# Altium PCB Pollux III.PcbDoc (part 1 of 3)
Units mm, origin at the board's own origin, x right, y up, seen from the top; angles counter-clockwise.
Board outline 123 x 84.5 mm, 4 copper layers (Top Layer, Ground Layer, Source Layer, Bottom Layer), stack 0.742 mm thick; 118 components, 107 nets, 741 pads, 375 vias.
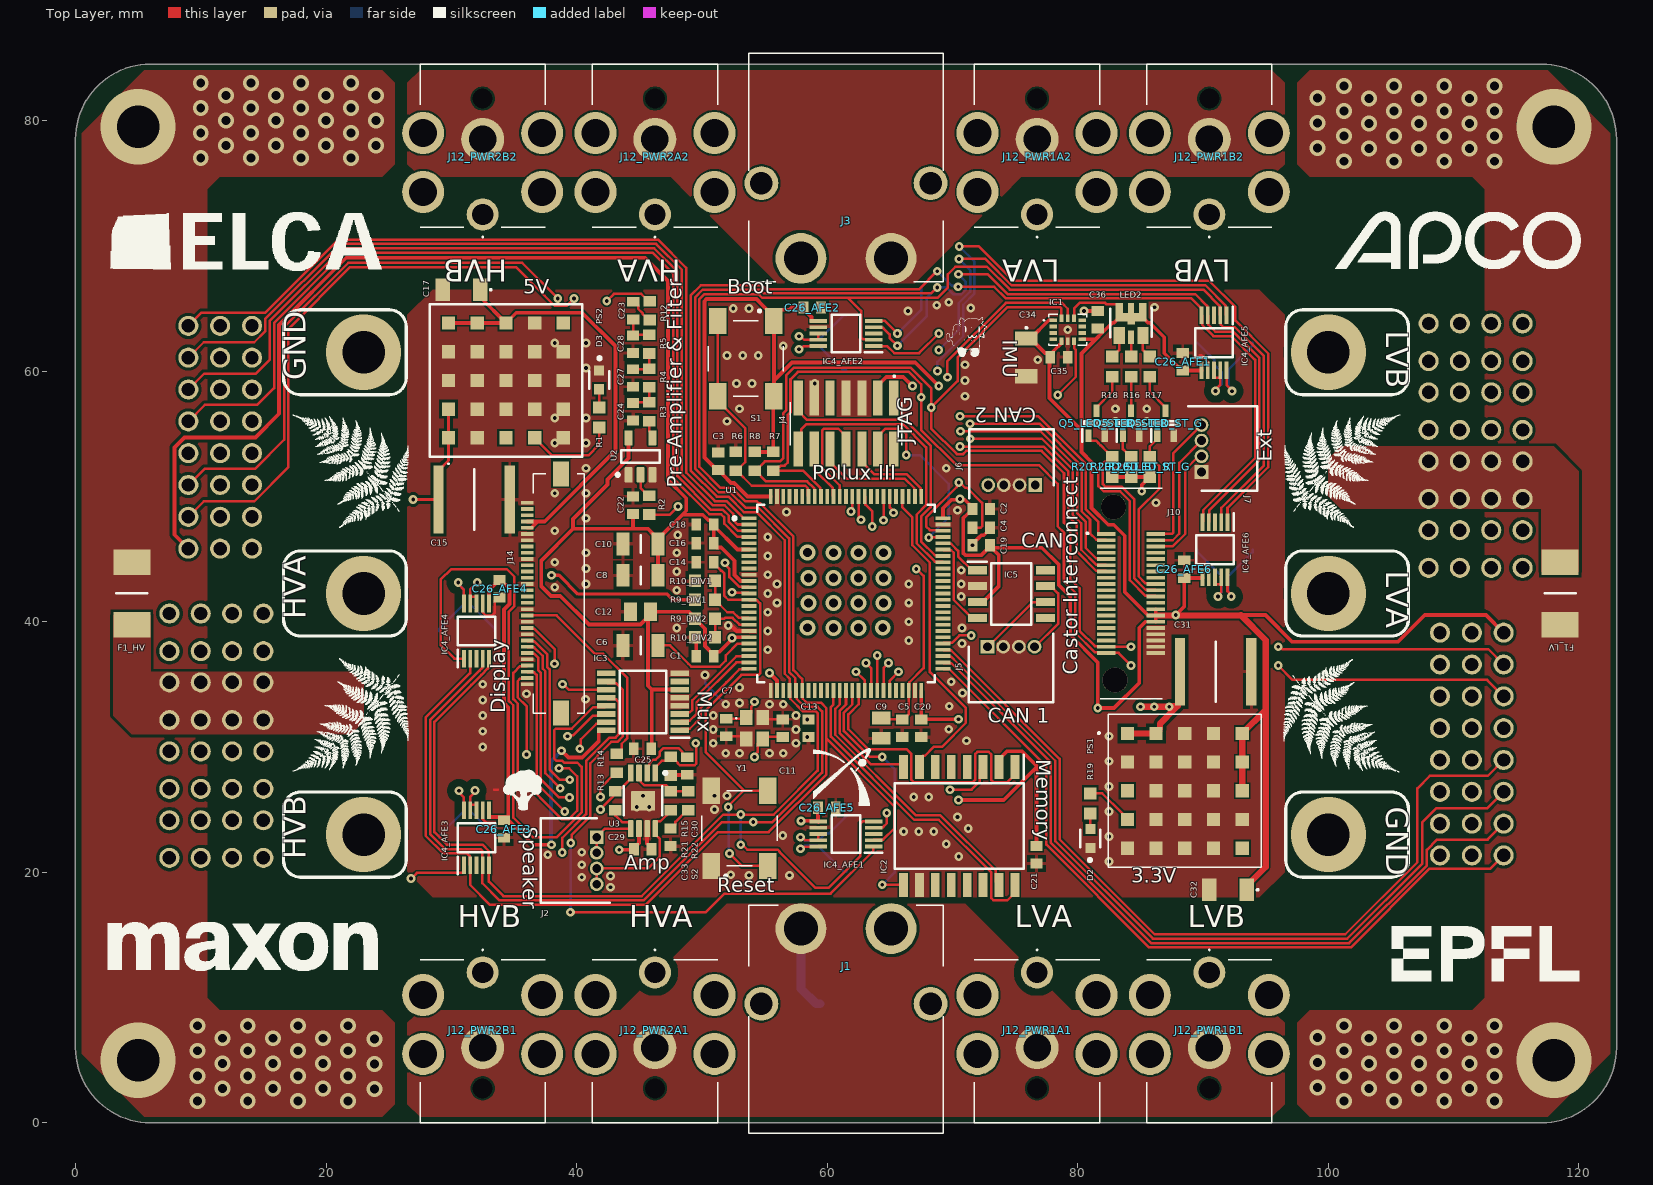
[diagram p0: Top Layer view]
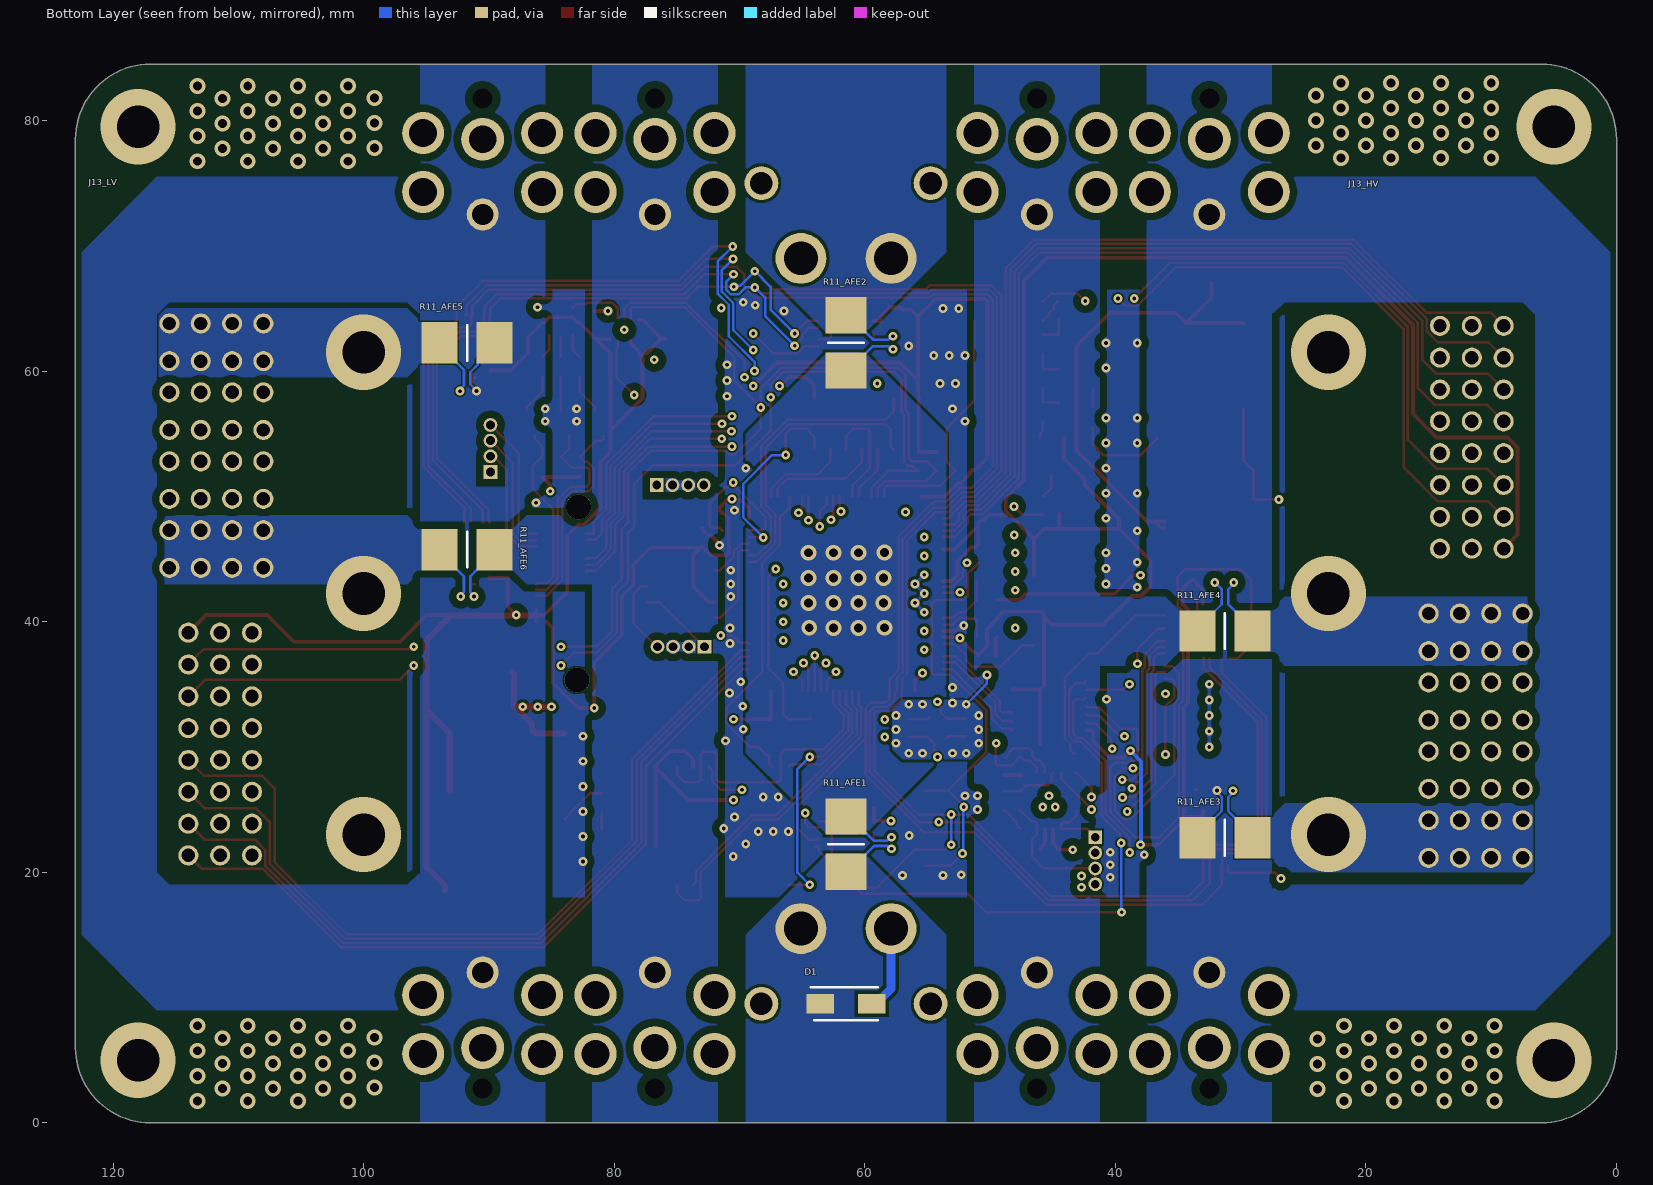
[diagram p1: Bottom Layer view, seen from below]
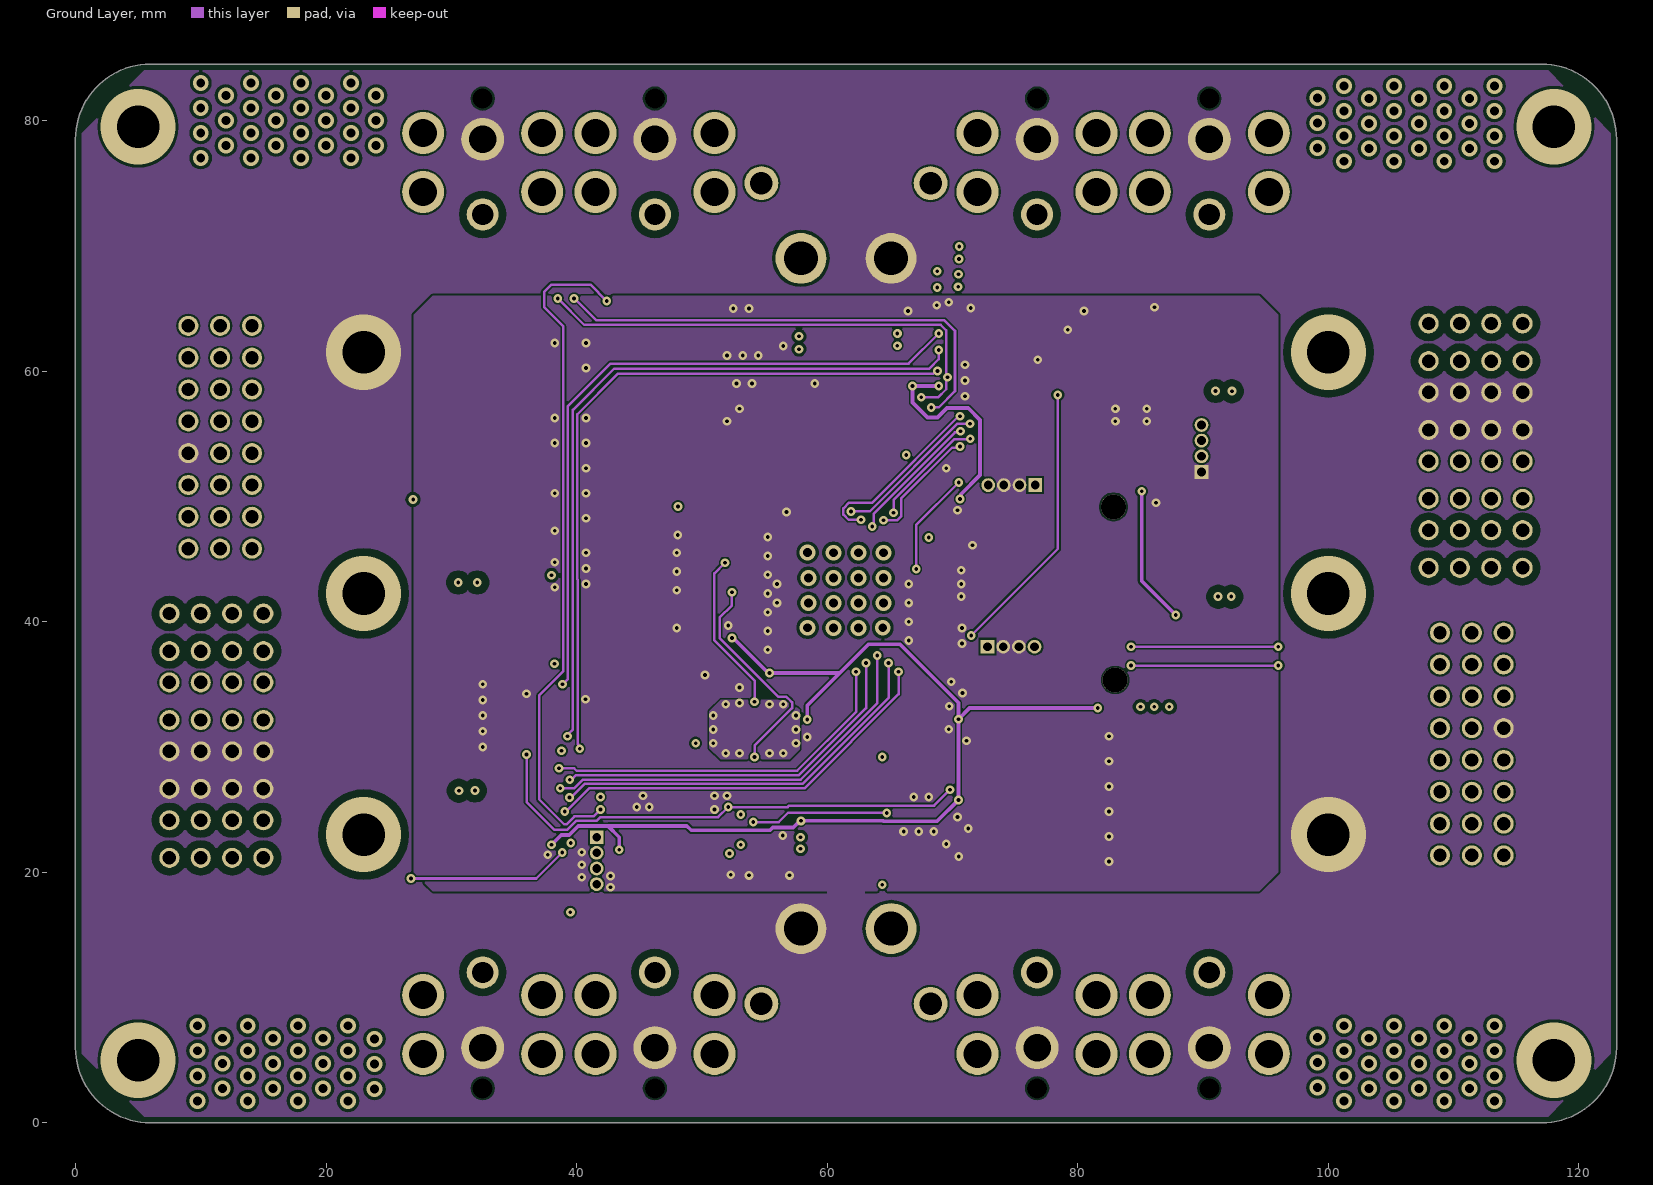
[diagram p2: Ground Layer]
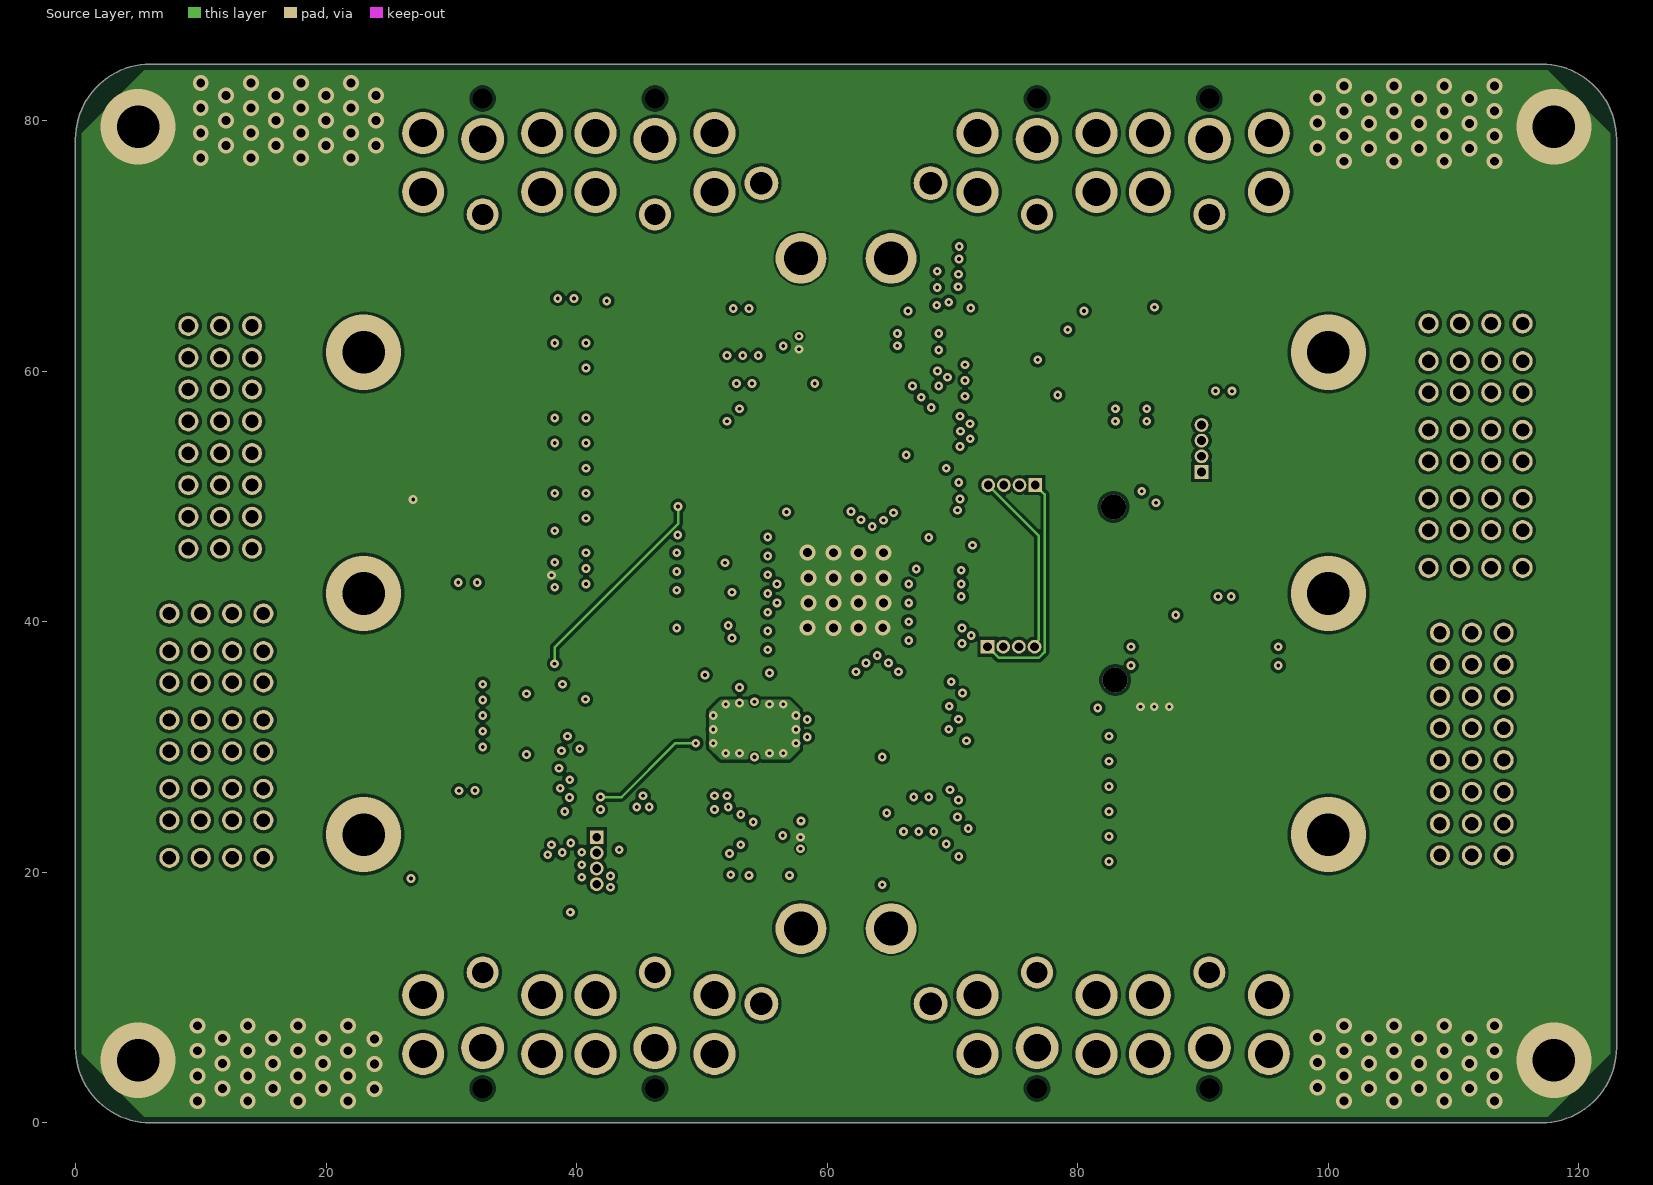
[diagram p3: Source Layer]
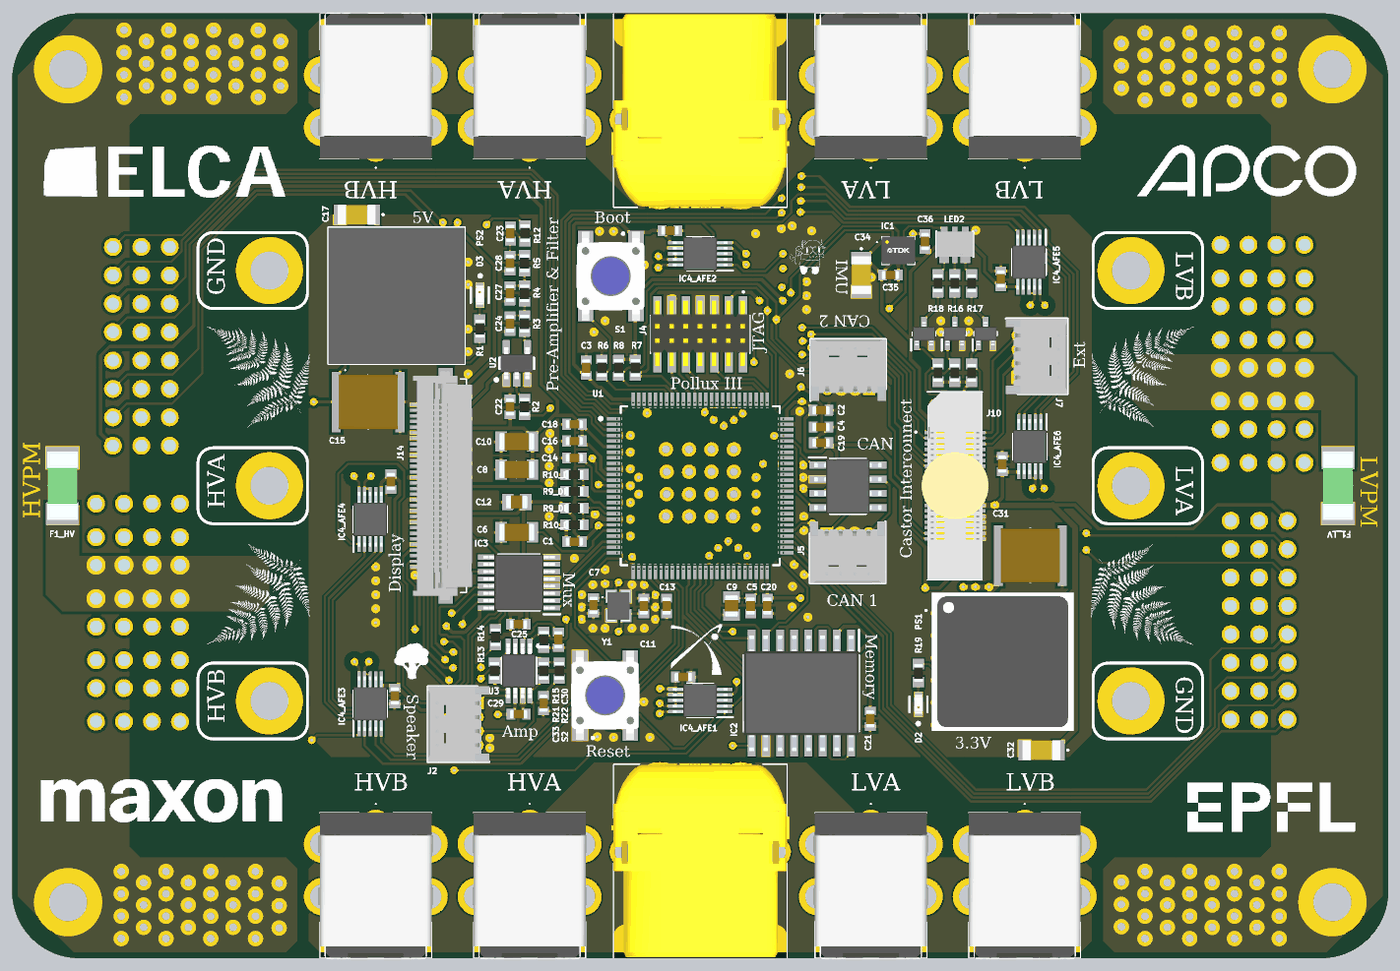
[diagram p5: 3D render of the assembled board from above, using the file's embedded part models]
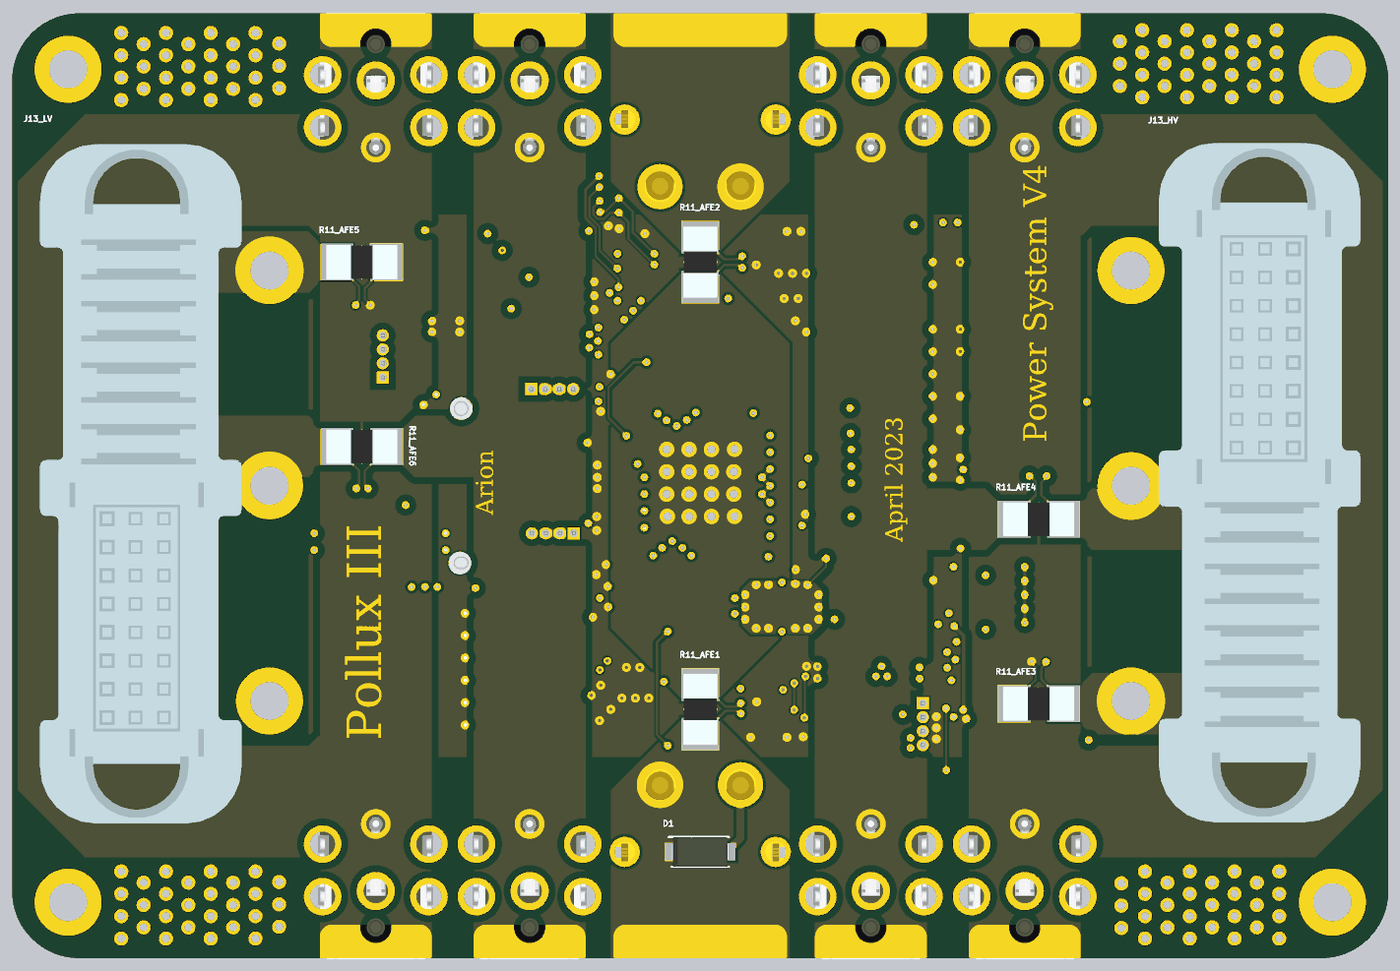
[diagram p6: 3D render of the assembled board from below, using the file's embedded part models]

## Layer stack, top to bottom
Top Solder: solder mask 0.0102, Solder Resist, Dk 3.5
Top Layer: signal copper 0.07
Dielectric 2: prepreg 0.0711, PP-006, Dk 4.1
Ground Layer: signal copper 0.07
Dielectric 1: dielectric 0.32, FR-4, Dk 4.8
Source Layer: signal copper 0.07
Dielectric 3: prepreg 0.0711, PP-006, Dk 4.1
Bottom Layer: signal copper 0.07
Bottom Solder: solder mask 0.0102, Solder Resist, Dk 3.5

## Board outline
0,6 0,78.5 cw(c6,78.5) 6,84.5 117,84.5 cw(c117,78.5) 123,78.5 123,6 cw(c117,6) 117,0 6,0 cw(c6,6)

## Design rules (kind name [scope] priority, off if disabled: settings)
Clearance Battery [InNet('V_IN') OR InNet('V_OUT') OR InNet('V_BAT') vs Not InNet('V_IN') AND Not InNet('V_OUT') AND Not InNet('V_BAT')] p1: gap=0.25 ignorepadtopadclearanceinfootprint=TRUE
Clearance HVB [InNet('HVB') OR InNet('OHVB') vs Not InNet('HVB') AND Not InNet('OHVB')] p2: gap=0.6 ignorepadtopadclearanceinfootprint=TRUE except(0.4: Arc-Arc Arc-Track Arc-SMDPad Track-Track Track-SMDPad)
Clearance HVA [InNet('HVA') OR InNet('OHVA') vs Not InNet('HVA') AND Not InNet('OHVA')] p3: gap=0.6 ignorepadtopadclearanceinfootprint=TRUE except(0.4: Arc-Arc Arc-Track Arc-SMDPad Track-Track Track-SMDPad)
Clearance LVB [InNet('LVB') OR InNet('OLVB') vs Not InNet('LVB') AND Not InNet('OLVB')] p4: gap=0.6 ignorepadtopadclearanceinfootprint=TRUE except(0.4: Arc-Arc Arc-Track Arc-SMDPad Track-Track Track-SMDPad)
Clearance LVA [InNet('LVA') OR InNet('OLVA') vs Not InNet('LVA') AND Not InNet('OLVA')] p5: gap=0.6 ignorepadtopadclearanceinfootprint=TRUE except(0.4: Arc-Arc Arc-Track Arc-SMDPad Track-Track Track-SMDPad)
Clearance "Low voltage" [All] p6: gap=0.15 ignorepadtopadclearanceinfootprint=TRUE
ComponentClearance [All] p1: gap=0.254 collisioncheckmode=3 verticalgap=0 showdistances=FALSE
HoleSize [All] p1: absolutevalues=TRUE maxlimit=5 minlimit=0.2 maxpercent=80.000 minpercent=20.000
HoleToHoleClearance [All] p1: gap=0.525 allowstackedmicrovias=TRUE
MinimumSolderMaskSliver [All] p1: minsoldermaskwidth=0.05
PlaneConnect [All] p1: planeconnectstyle=Direct reliefexpansion=0.508 reliefentries=4 reliefconductorwidth=0.254 reliefairgap=0.254
PolygonConnect PolygonConnect_1 [(HasFootprint('RES*') OR HasFootprint('CAP*')) AND NOT HasFootprint('RESC6430X90N')] p1: connectstyle=Relief reliefconductorwidth=0.254 reliefentries=4 polygonreliefangle="90 Angle" airgapwidth=0.254
PolygonConnect [All] p2: connectstyle=Direct reliefconductorwidth=0.254 reliefentries=4 polygonreliefangle="90 Angle" airgapwidth=0.254
RoomDefinition TopLevel [InComponentClass('TopLevel')] p1 off: confinementstyle=ConfineIn formatcopy=TRUE lockcomponents=FALSE outline -17.9,-25.4 32.9,-25.4 32.9,0 -17.9,0
RoomDefinition PWR2B2 [InComponentClass('PWR2B2')] p2 off: confinementstyle=ConfineIn formatcopy=TRUE lockcomponents=FALSE outline -17.9,-25.4 32.9,-25.4 32.9,0 -17.9,0
RoomDefinition PWR2B1 [InComponentClass('PWR2B1')] p3 off: confinementstyle=ConfineIn formatcopy=TRUE lockcomponents=FALSE outline -17.9,-25.4 32.9,-25.4 32.9,0 -17.9,0
RoomDefinition PWR2A2 [InComponentClass('PWR2A2')] p4 off: confinementstyle=ConfineIn formatcopy=TRUE lockcomponents=FALSE outline -17.9,-25.4 32.9,-25.4 32.9,0 -17.9,0
RoomDefinition PWR2A1 [InComponentClass('PWR2A1')] p5 off: confinementstyle=ConfineIn formatcopy=TRUE lockcomponents=FALSE outline -17.9,-25.4 32.9,-25.4 32.9,0 -17.9,0
RoomDefinition PWR1B2 [InComponentClass('PWR1B2')] p6 off: confinementstyle=ConfineIn formatcopy=TRUE lockcomponents=FALSE outline -17.9,-25.4 32.9,-25.4 32.9,0 -17.9,0
RoomDefinition PWR1B1 [InComponentClass('PWR1B1')] p7 off: confinementstyle=ConfineIn formatcopy=TRUE lockcomponents=FALSE outline -17.9,-25.4 32.9,-25.4 32.9,0 -17.9,0
RoomDefinition PWR1A2 [InComponentClass('PWR1A2')] p8 off: confinementstyle=ConfineIn formatcopy=TRUE lockcomponents=FALSE outline -17.9,-25.4 32.9,-25.4 32.9,0 -17.9,0
RoomDefinition PWR1A1 [InComponentClass('PWR1A1')] p9 off: confinementstyle=ConfineIn formatcopy=TRUE lockcomponents=FALSE outline -17.9,-25.4 32.9,-25.4 32.9,0 -17.9,0
RoomDefinition LV [InComponentClass('LV')] p10 off: confinementstyle=ConfineIn formatcopy=TRUE lockcomponents=FALSE outline -17.9,-25.4 32.9,-25.4 32.9,0 -17.9,0
RoomDefinition LED_ST_R [InComponentClass('LED_ST_R')] p11 off: confinementstyle=ConfineIn formatcopy=TRUE lockcomponents=FALSE outline -17.9,-25.4 32.9,-25.4 32.9,0 -17.9,0
RoomDefinition LED_ST_G [InComponentClass('LED_ST_G')] p12 off: confinementstyle=ConfineIn formatcopy=TRUE lockcomponents=FALSE outline -17.9,-25.4 32.9,-25.4 32.9,0 -17.9,0
RoomDefinition LED_ST_B [InComponentClass('LED_ST_B')] p13 off: confinementstyle=ConfineIn formatcopy=TRUE lockcomponents=FALSE outline -17.9,-25.4 32.9,-25.4 32.9,0 -17.9,0
RoomDefinition Interconnect [InComponentClass('Interconnect')] p14 off: confinementstyle=ConfineIn formatcopy=TRUE lockcomponents=FALSE outline -17.9,-25.4 32.9,-25.4 32.9,0 -17.9,0
RoomDefinition IMU [InComponentClass('IMU')] p15 off: confinementstyle=ConfineIn formatcopy=TRUE lockcomponents=FALSE outline -17.9,-25.4 32.9,-25.4 32.9,0 -17.9,0
RoomDefinition HV [InComponentClass('HV')] p16 off: confinementstyle=ConfineIn formatcopy=TRUE lockcomponents=FALSE outline -17.9,-25.4 32.9,-25.4 32.9,0 -17.9,0
RoomDefinition FLASH [InComponentClass('FLASH')] p17 off: confinementstyle=ConfineIn formatcopy=TRUE lockcomponents=FALSE outline -17.9,-25.4 32.9,-25.4 32.9,0 -17.9,0
RoomDefinition DIV2 [InComponentClass('DIV2')] p18 off: confinementstyle=ConfineIn formatcopy=TRUE lockcomponents=FALSE outline -17.9,-25.4 32.9,-25.4 32.9,0 -17.9,0
RoomDefinition DIV1 [InComponentClass('DIV1')] p19 off: confinementstyle=ConfineIn formatcopy=TRUE lockcomponents=FALSE outline -17.9,-25.4 32.9,-25.4 32.9,0 -17.9,0
RoomDefinition DISP [InComponentClass('DISP')] p20 off: confinementstyle=ConfineIn formatcopy=TRUE lockcomponents=FALSE outline -17.9,-25.4 32.9,-25.4 32.9,0 -17.9,0
RoomDefinition CU [InComponentClass('CU')] p21 off: confinementstyle=ConfineIn formatcopy=TRUE lockcomponents=FALSE outline -17.9,-25.4 32.9,-25.4 32.9,0 -17.9,0
RoomDefinition CTA [InComponentClass('CTA')] p22 off: confinementstyle=ConfineIn formatcopy=TRUE lockcomponents=FALSE outline -17.9,-25.4 32.9,-25.4 32.9,0 -17.9,0
RoomDefinition CAN [InComponentClass('CAN')] p23 off: confinementstyle=ConfineIn formatcopy=TRUE lockcomponents=FALSE outline -17.9,-25.4 32.9,-25.4 32.9,0 -17.9,0
RoomDefinition AUX [InComponentClass('AUX')] p24 off: confinementstyle=ConfineIn formatcopy=TRUE lockcomponents=FALSE outline -17.9,-25.4 32.9,-25.4 32.9,0 -17.9,0
RoomDefinition AUDIO [InComponentClass('AUDIO')] p25 off: confinementstyle=ConfineIn formatcopy=TRUE lockcomponents=FALSE outline -17.9,-25.4 32.9,-25.4 32.9,0 -17.9,0
RoomDefinition AFE6 [InComponentClass('AFE6')] p26 off: confinementstyle=ConfineIn formatcopy=TRUE lockcomponents=FALSE outline -17.9,-25.4 32.9,-25.4 32.9,0 -17.9,0
RoomDefinition AFE5 [InComponentClass('AFE5')] p27 off: confinementstyle=ConfineIn formatcopy=TRUE lockcomponents=FALSE outline -17.9,-25.4 32.9,-25.4 32.9,0 -17.9,0
RoomDefinition AFE4 [InComponentClass('AFE4')] p28 off: confinementstyle=ConfineIn formatcopy=TRUE lockcomponents=FALSE outline -17.9,-25.4 32.9,-25.4 32.9,0 -17.9,0
RoomDefinition AFE3 [InComponentClass('AFE3')] p29 off: confinementstyle=ConfineIn formatcopy=TRUE lockcomponents=FALSE outline -17.9,-25.4 32.9,-25.4 32.9,0 -17.9,0
RoomDefinition AFE2 [InComponentClass('AFE2')] p30 off: confinementstyle=ConfineIn formatcopy=TRUE lockcomponents=FALSE outline -17.9,-25.4 32.9,-25.4 32.9,0 -17.9,0
RoomDefinition AFE1 [InComponentClass('AFE1')] p31 off: confinementstyle=ConfineIn formatcopy=TRUE lockcomponents=FALSE outline -17.9,-25.4 32.9,-25.4 32.9,0 -17.9,0
RoutingVias [All] p1: holewidth=0.711 width=1.27 viastyle="Through Hole" minholewidth=0.711 minwidth=1.27 maxholewidth=0.711 maxwidth=1.27
SilkToSilkClearance [All] p1: silktosilkclearance=0
SilkToSolderMaskClearance [IsPad] p1: minsilkscreentomaskgap=0 clearancetoexposedcopper=TRUE
SolderMaskExpansion [All] p1: expansion=0.05 istentingtop=FALSE
Width [All] p1: maxlimit=10 minlimit=0.125 preferedwidth=0.15
23 further rules are at their usual default settings.

## Classes and differential pairs
component class DISP: J14 R14 R15
component class IMU: C34 C35 C36 IC1
component class FLASH: C19 IC2
component class CAN: C21 IC5
component class AUDIO: C22 C23 C24 C27 C28 C29 C30 C33 J2 R2 R3 R4 R5 R12 R13 R21 R22 U2 U3
component class PWR2B2: J12_PWR2B2
component class PWR2B1: J12_PWR2B1
component class PWR2A2: J12_PWR2A2
component class PWR2A1: J12_PWR2A1
component class PWR1B2: J12_PWR1B2
component class PWR1B1: J12_PWR1B1
component class PWR1A2: J12_PWR1A2
component class PWR1A1: J12_PWR1A1
component class LV: F1_LV J13_LV
component class HV: F1_HV J13_HV
channel class PowerConnector: PWR1A1 PWR1A2 PWR1B1 PWR1B2 PWR2A1 PWR2A2 PWR2B1 PWR2B2
channel class ModuleCarrier: HV LV
channel class LED: LED_ST_B LED_ST_G LED_ST_R
channel class DIV30: DIV1 DIV2
channel class AnalogFrontEnd: AFE1 AFE2 AFE3 AFE4 AFE5 AFE6
net class N000-1_[6..0]: SBUS0 SBUS1 SBUS2 SBUS3 SBUS4 SBUS5 SBUS6
component class TopLevel: D1 J1 J3 J5 J6 J17
component class LED_ST_R: Q5_LED_ST_R R20_LED_ST_R
component class LED_ST_G: Q5_LED_ST_G R20_LED_ST_G
component class LED_ST_B: Q5_LED_ST_B R20_LED_ST_B
component class Interconnect: J7 J10 LED2 R16 R17 R18
component class DIV2: R9_DIV2 R10_DIV2
component class DIV1: R9_DIV1 R10_DIV1
component class CU: C25 IC3 R7 R8
component class CTA: C1 C2 C3 C4 C5 C6 C7 C8 C9 C10 C11 C12 C13 C14 C16 C18 C20 J4 R6 S1 S2 U1 Y1
component class AUX: C15 C17 C31 C32 D2 D3 LED3 PS1 PS2 R1 R19
component class AFE6: C26_AFE6 IC4_AFE6 R11_AFE6
component class AFE5: C26_AFE5 IC4_AFE5 R11_AFE5
component class AFE4: C26_AFE4 IC4_AFE4 R11_AFE4
component class AFE3: C26_AFE3 IC4_AFE3 R11_AFE3
component class AFE2: C26_AFE2 IC4_AFE2 R11_AFE2
component class AFE1: C26_AFE1 IC4_AFE1 R11_AFE1

## Components (designator, comment, footprint, x,y, rotation, side; value= is the part's Value field where it differs from the comment)
C1 "C0603C104K5RACTU" CAPC1608X95N 50.25,37.25 r180 top value=100n
C2 "C0603C104K5RACTU" CAPC1608X95N 72.3,49 r0 top value=100n
C3 "C0603C104K5RACTU" CAPC1608X95N 51.3,52.8 r90 top value=100n
C4 "C0603C104K5RACTU" CAPC1608X95N 72.3,47.5 r0 top value=100n
C5 "C0603C104K5RACTU" CAPC1608X95N 66,31.5 r270 top value=100n
C6 "C1206C105M5RECTU" CAPC3216X130N 45.1,38.1 r0 top value=1uF
C7 "CBR06C569B5GAC" CAPC1608X87N 51.95,31.55 r90 top value=5.6pF
C8 "C1206C105M5RECTU" CAPC3216X130N 45.1,43.7 r0 top value=1uF
C9 "C0805C225K4REC7210" CAPC2012X140N 64.3,31.5 r90 top value=2.2uF
C10 "C1206C105M5RECTU" CAPC3216X130N 45.1,46.2 r0 top value=1uF
C11 "CBR06C569B5GAC" CAPC1608X87N 56.45,31.5 r270 top value=5.6pF
C12 "C0805C475M4PACTU" CAPC2012X140N 45.1,40.8 r180 top value=4.7uF
C13 "C0603C104K5RACTU" CAPC1608X95N 58.5,31.5 r270 top value=100n
C14 "C0603C104K5RACTU" CAPC1608X95N 50.25,44.75 r180 top value=100n
C15 "C5750JB2A475M230KA" CAPC5750X310N 31.817,49.75 r0 top value=4.7u
C16 "C0603C104K5RACTU" CAPC1608X95N 50.25,46.25 r180 top value=100n
C17 "C1206C106K4RACTU" C1206 30.8,66.5 r180 top value=10u
C18 "C0603C104K5RACTU" CAPC1608X95N 50.25,47.75 r180 top value=100n
C19 "C0603C104K5RACTU" CAPC1608X95N 72.3,46.1 r180 top value=100n
C20 "C0603C104K5RACTU" CAPC1608X95N 67.5,31.5 r270 top value=100n
C21 "C0603C104K5RACTU" CAPC1608X95N 76.7,21.4 r270 top value=100n
C22 "C0603C104K5RACTU" CAPC1608X95N 44.5,49.3 r90 top value=100n
C23 "C0603C474K4PACTU" CAPC1608X95N 44.525,64.826 r270 top value=470n
C24 "C0603C472J5RACTU" CAPC1608X95N 44.5,56.75 r270 top value=4.7n
C25 "C0603C104K5RACTU" CAPC1608X95N 45.25,29.85 r180 top value=100n
C26_AFE1 "C0603C104K5RACTU" CAPC1608X95N 88.375,60.75 r270 top value=100n (schematic designator C26)
C26_AFE2 "C0603C104K5RACTU" CAPC1608X95N 58.8,65.075 r180 top value=100n (schematic designator C26)
C26_AFE3 "C0603C104K5RACTU" CAPC1608X95N 34.2,23.45 r90 top value=100n (schematic designator C26)
C26_AFE4 "C0603C104K5RACTU" CAPC1608X95N 33.85,42.625 r90 top value=100n (schematic designator C26)
C26_AFE5 "C0603C104K5RACTU" CAPC1608X95N 59.975,25.15 r180 top value=100n (schematic designator C26)
C26_AFE6 "C0603C104K5RACTU" CAPC1608X95N 88.502,44.194 r270 top value=100n (schematic designator C26)
C27 "C0603C472J5RACTU" CAPC1608X95N 44.5,59.45 r270 top value=4.7n
C28 "C0603C472J5RACTU" CAPC1608X95N 44.5,62.15 r270 top value=4.7n
C29 "C0603C105K4RACTU" CAPC1608X95N 45.275,21.824 r0 top value=1u
C30 "C0603C224K8RAC7411" CAPC1608X95N 48.825,28.476 r90 top value=220n
C31 "C5750JB2A475M230KA" CAPC5750X310N 91,36 r0 top value=4.7u
C32 "C1206C106K4RACTU" C1206 92,18.6 r180 top value=10u
C33 "C0603C474K4PACTU" CAPC1608X95N 47.5,22.8 r90 top value=470n
C34 "C1206J225J4RACAUTO" C1206 75.9,61.1 r270 top value=2.2u
C35 "C0603C103K5RACTU" CAPC1608X95N 78.5,61.1 r0 top value=10n
C36 "C0603C104K5RACTU" CAPC1608X95N 81.6,64.1 r90 top value=100n
D1 "BZG03C33-HM3-08" DIOM5127X229N 61.5,9.5 r180 bottom
D2 "LS L29K-G1J2-1-Z" FP-LS_L29K-MFG 81,22.7 r90 top
D3 "LS L29K-G1J2-1-Z" FP-LS_L29K-MFG 41.8,59.3 r270 top
F1_HV "0451020.MRL" FUSC6127X294N 4.5,42.25 r270 top (schematic designator F1)
F1_LV "0451020.MRL" FUSC6127X294N 118.5,42.25 r90 top (schematic designator F1)
IC1 "ICM-42670-P" ICM42670P 79.2,63.3 r0 top
IC2 "MT25QL512ABB8ESF-0AAT" SOIC127P1032X265-16N 70.535,23.688 r270 top
IC3 "CD74HC137PWR" SOP65P640X120-16N 45.3,33.6 r180 top
IC4_AFE1 "INA239AQDGSRQ1" SOP50P490X110-10N 61.5,23.05 r180 top locked (schematic designator IC4)
IC4_AFE2 "INA239AQDGSRQ1" SOP50P490X110-10N 61.5,63 r180 top locked (schematic designator IC4)
IC4_AFE3 "INA239AQDGSRQ1" SOP50P490X110-10N 32,22.75 r90 top locked (schematic designator IC4)
IC4_AFE4 "INA239AQDGSRQ1" SOP50P490X110-10N 32,39.25 r90 top locked (schematic designator IC4)
IC4_AFE5 "INA239AQDGSRQ1" SOP50P490X110-10N 90.875,62.25 r270 top locked (schematic designator IC4)
IC4_AFE6 "INA239AQDGSRQ1" SOP50P490X110-10N 90.95,45.75 r270 top locked (schematic designator IC4)
IC5 "SN65HVD232QDR" SOIC127P600X175-8N 74.7,42.2 r0 top
J1 "XT60PW-M" XT60PWM 61.5,15.5 r180 top locked
J2 "53048-0450" SHDRRA4W35P0X125_1X4_675X550X350P 41.6,22.8 r90 top
J3 "XT60PW-M" XT60PWM 61.5,69 r0 top locked
J4 "FTSH-107-01-F-DV" FTSH-107-XX-YYY-DV 61.5,55.8 r180 top locked
J5 "53048-0450" SHDRRA4W35P0X125_1X4_675X550X350P 72.8,38 r180 top
J6 "53048-0450" SHDRRA4W35P0X125_1X4_675X550X350P 76.6,50.9 r0 top
J7 "53048-0450" SHDRRA4W35P0X125_1X4_675X550X350P 89.875,51.95 r270 top
J10 "ERF5-020-07.0-L-DV-K-TR" ERF5-020-XX.X-Y-DV-K-TR 84.25,42.25 r90 top locked
J12_PWR1A1 "PJ-082BH" PJ082BH 76.75,12 r90 top locked (schematic designator J12)
J12_PWR1A2 "PJ-082BH" PJ082BH 76.75,72.5 r270 top locked (schematic designator J12)
J12_PWR1B1 "PJ-082BH" PJ082BH 90.5,12 r90 top locked (schematic designator J12)
J12_PWR1B2 "PJ-082BH" PJ082BH 90.5,72.5 r270 top locked (schematic designator J12)
J12_PWR2A1 "PJ-082BH" PJ082BH 46.25,12 r90 top locked (schematic designator J12)
J12_PWR2A2 "PJ-082BH" PJ082BH 46.25,72.5 r270 top locked (schematic designator J12)
J12_PWR2B1 "PJ-082BH" PJ082BH 32.5,12 r90 top locked (schematic designator J12)
J12_PWR2B2 "PJ-082BH" PJ082BH 32.5,72.5 r270 top locked (schematic designator J12)
J13_HV "46562-3001" 465623001 7.5,21.15 r90 bottom locked (schematic designator J13)
J13_LV "46562-3001" 465623001 115.5,63.8 r270 bottom (schematic designator J13)
J14 "505110-3091" 5051103091 38.075,42.25 r90 top
LED2 "KRTBDWLM" KRTBDWLM3232T4U6JWAAABJ3R4S65V 84.25,63.863 r180 top
PS1 "RPMB3.3-3.0" RPMB5030 88.54,26.5 r0 top
PS2 "RPMB5.0-2.0" RPMB5020 34.357,59.25 r90 top
Q5_LED_ST_B "DMN2004WK-7" SOT65P210X110-3N 81.5,55.85 r90 top (schematic designator Q5)
Q5_LED_ST_G "DMN2004WK-7" SOT65P210X110-3N 87,55.85 r90 top (schematic designator Q5)
Q5_LED_ST_R "DMN2004WK-7" SOT65P210X110-3N 84.25,55.85 r90 top (schematic designator Q5)
R1 "CRCW06031K00JNEAC" RESC1608X55N 41.8,56.3 r270 top value=1k
R2 "CRCW060333R0JNEAC" RESC1608X50N 45.8,49.3 r90 top value=33
R3 "CRCW06031K00FKECC" RESC1608X50N 45.8,56.75 r270 top value=1k
R4 "CRCW06031K00FKECC" RESC1608X50N 45.8,59.45 r270 top value=1k
R5 "CRCW06031K00FKECC" RESC1608X50N 45.8,62.15 r270 top value=1k
R6 "CRCW06032K00JNEB" RESC1608X50N 52.7,52.8 r270 top value=2k
R7 "CRCW06032K00JNEB" RESC1608X50N 55.7,52.8 r270 top value=2k
R8 "CRCW06032K00JNEB" RESC1608X50N 54.2,52.8 r270 top value=2k
R9_DIV1 "TNPW0603100KBEEA" RESC1608X55N 50.25,41.75 r0 top value=100k (schematic designator R9)
R9_DIV2 "TNPW0603100KBEEA" RESC1608X55N 50.25,40.25 r0 top value=100k (schematic designator R9)
R10_DIV1 "TNPW06033K00BEEA" RESC1608X55N 50.25,43.25 r180 top value=3k (schematic designator R10)
R10_DIV2 "TNPW06033K00BEEA" RESC1608X55N 50.25,38.75 r180 top value=3k (schematic designator R10)
R11_AFE1 "PCS2512FR0010ET" RESC6430X90N 61.5,22.25 r90 bottom locked value=1m (schematic designator R11)
R11_AFE2 "PCS2512FR0010ET" RESC6430X90N 61.5,62.25 r90 bottom locked value=1m (schematic designator R11)
R11_AFE3 "PCS2512FR0010ET" RESC6430X90N 31.25,22.75 r0 bottom locked value=1m (schematic designator R11)
R11_AFE4 "PCS2512FR0010ET" RESC6430X90N 31.25,39.25 r0 bottom locked value=1m (schematic designator R11)
R11_AFE5 "PCS2512FR0010ET" RESC6430X90N 91.75,62.25 r180 bottom locked value=1m (schematic designator R11)
R11_AFE6 "PCS2512FR0010ET" RESC6430X90N 91.75,45.75 r180 bottom locked value=1m (schematic designator R11)
R12 "CRCW060310K2FKEA" RESC1608X50N 45.825,64.826 r90 top value=10k
R13 "CRCW060320K0FKEAC" RESC1608X50N 43.1,25.7 r90 top value=20k
R14 "CRCW060333R0JNEAC" RESC1608X50N 43.2,28.7 r270 top value=33
R15 "CRCW060347K0FKEAC" RESC1608X50N 47.525,28.476 r90 top value=47k
R16 "CRCW060320R0FKEAC" RESC1608X55N 84.25,60.35 r90 top value=20
R17 "CRCW060310R0JNEAC" RESC1608X55N 85.75,60.35 r90 top value=10
R18 "CRCW060310R0JNEAC" RESC1608X55N 82.75,60.35 r90 top value=10
R19 "CRCW06031K00JNEAC" RESC1608X55N 81,25.5 r90 top value=1k
R20_LED_ST_B "CRCW060349K9FKEAC" RESC1608X55N 82.75,52.35 r90 top value=1k (schematic designator R20)
R20_LED_ST_G "CRCW060349K9FKEAC" RESC1608X55N 85.75,52.35 r90 top value=1k (schematic designator R20)
R20_LED_ST_R "CRCW060349K9FKEAC" RESC1608X55N 84.25,52.35 r90 top value=1k (schematic designator R20)
R21 "CRCW060320K0FKEAC" RESC1608X50N 47.5,25.7 r90 top value=20k
R22 "CRCW060310K2FKEA" RESC1608X50N 48.9,25.7 r270 top value=10k
S1 "BOOT" LL3301FF065QJ 53.5,61 r270 top locked
S2 "RESET" LL3301FF065QJ 53,23.5 r90 top locked
U1 "STM32H750VBT6" FP-LQFP100-1L-MFG 61.5,42.25 r0 top locked
U2 "SN74LVC1G125DBVR" DBV0005A_M 45.1,53.2 r90 top
U3 "TPA6205A1DGN" DGN0008D_N 45.3,25.7 r270 top
Y1 "NX3225SA-30.000M-STD-CSR-3" NX2520SA192MHzEXS00ACS05400 54.2,31.5 r270 top

## Footprints (in the part's own frame and the unit in brackets; to place one, negate y for a bottom-side part, rotate by r counter-clockwise, add the part's x,y. Pads: shape width x height; smd on the part's side, far side on the other; paste and mask are expansions set on the pad)
465623001 [mm]
  round 1.605 hole 1.07: P1(0,0) P1(0,2.5) P1(0,5) P1(0,7.5) P1(3,0) P1(3,2.5) P1(3,5) P1(3,7.5) P2(5.5,0) P2(5.5,2.5) P2(5.5,5) P2(5.5,7.5) P2(8.5,0) P2(8.5,2.5) P2(8.5,5) P2(8.5,7.5) P3(11,0) P3(11,2.5) P3(11,5) P3(11,7.5) P3(14,0) P3(14,2.5) P3(14,5) P3(14,7.5) P4(16.5,0) P4(16.5,2.5) P4(16.5,5) P4(16.5,7.5) P4(19.5,0) P4(19.5,2.5) P4(19.5,5) P4(19.5,7.5) S1(24.68,6.59) S2(27.22,6.59) S3(29.76,6.59) S4(32.3,6.59) S5(34.84,6.59) S6(37.38,6.59) S7(39.92,6.59) S8(42.46,6.59) S9(24.68,4.05) S10(27.22,4.05) S11(29.76,4.05) S12(32.3,4.05) S13(34.84,4.05) S14(37.38,4.05) S15(39.92,4.05) S16(42.46,4.05) S17(24.68,1.51) S18(27.22,1.51) S19(29.76,1.51) S20(32.3,1.51) S21(34.84,1.51) S22(37.38,1.51) S23(39.92,1.51) S24(42.46,1.51)
  body extent -9,-5 51.76,13, height 14.22
5051103091 [mm]
  rect 0.3x1 smd: 1(-7.25,2.025) 2(-6.75,2.025) 3(-6.25,2.025) 4(-5.75,2.025) 5(-5.25,2.025) 6(-4.75,2.025) 7(-4.25,2.025) 8(-3.75,2.025) 9(-3.25,2.025) 10(-2.75,2.025) 11(-2.25,2.025) 12(-1.75,2.025) 13(-1.25,2.025) 14(-0.75,2.025) 15(-0.25,2.025) 16(0.25,2.025) 17(0.75,2.025) 18(1.25,2.025) 19(1.75,2.025) 20(2.25,2.025) 21(2.75,2.025) 22(3.25,2.025) 23(3.75,2.025) 24(4.25,2.025) 25(4.75,2.025) 26(5.25,2.025) 27(5.75,2.025) 28(6.25,2.025) 29(6.75,2.025) 30(7.25,2.025)
  rect 2x1.3 smd: MP1(-9.55,-0.675) MP2(9.55,-0.675)
  silkscreen extent -9.55,-2.52 9.55,1.53, body extent -10.25,-3.02 10.25,2.28, height 1.9
C1206 [mm]
  rect 1.15x1.8 smd: 1(-1.5,0) 2(1.5,0)
  silkscreen extent -2.4,-0.05 -2.3,0.05, body extent -1.7,-0.9 1.7,0.9, height 1.8
CAPC1608X87N [mm]
  rect 0.78x0.98 smd: 1(-0.7,0) 2(0.7,0)
  body extent -0.8,-0.4 0.8,0.4, height 0.87
CAPC1608X95N [mm]
  rect 0.78x0.98 smd: 1(-0.7,0) 2(0.7,0)
  body extent -0.8,-0.4 0.8,0.4, height 0.95
CAPC2012X140N [mm]
  rect 1.02x1.47 smd: 1(-0.8,0) 2(0.8,0)
  body extent -1,-0.63 1,0.63, height 1.4
CAPC3216X130N [mm]
  rect 1.02x1.82 smd: 1(-1.4,0) 2(1.4,0)
  silkscreen extent 0,-0.7 0,0.7, body extent -1.6,-0.8 1.6,0.8, height 1.3
CAPC5750X310N [mm]
  rect 0.81x5.41 smd: 1(-2.85,0) 2(2.85,0)
  silkscreen extent 0,-2.4 0,2.4, body extent -2.65,-2.45 2.65,2.45, height 3.07
DBV0005A_M [mm] "SOT23, 5-Leads, Body 3.05x1.75mm, Pitch 0.95mm, IPC Low Density"
  rrect15% 1.2x0.65 smd: 1(-1.475,0.95) 2(-1.475,0) 3(-1.475,-0.95) 4(1.475,-0.95) 5(1.475,0.95)
  silkscreen extent -1.6,-1.55 0.5,1.95, body extent -1.42,-1.46 1.42,1.46, height 1.08
DGN0008D_N [mm] "TSOP, 8-Leads, Body 3.1x3.1mm, Pitch 0.65mm, Thermal Pad 1.89x1.57mm, IPC Medium Density"
  rrect22% 1.35x0.45 smd: 1(-2.225,0.975) 2(-2.225,0.325) 3(-2.225,-0.325) 4(-2.225,-0.975) 5(2.225,-0.975) 6(2.225,-0.325) 7(2.225,0.325) 8(2.225,0.975)
  rrect6% 1.57x1.89 smd: 9(0,0)
  silkscreen extent -2.35,-1.55 1.15,1.9, body extent -2.45,-1.5 2.45,1.5, height 0.94
DIOM5127X229N [mm]
  rect 2.2x1.55 smd: 1(-2.05,0) 2(2.05,0)
  silkscreen extent -2.83,-1.33 2.55,1.33, body extent -2.55,-1.33 2.55,1.33, height 2.29
ERF5-020-XX.X-Y-DV-K-TR [mm]
  rect 0.3x1.5 smd: 1(4.75,1.975) 2(4.75,-1.975) 3(4.25,1.975) 4(4.25,-1.975) 5(3.75,1.975) 6(3.75,-1.975) 7(3.25,1.975) 8(3.25,-1.975) 9(2.75,1.975) 10(2.75,-1.975) 11(2.25,1.975) 12(2.25,-1.975) 13(1.75,1.975) 14(1.75,-1.975) 15(1.25,1.975) 16(1.25,-1.975) 17(0.75,1.975) 18(0.75,-1.975) 19(0.25,1.975) 20(0.25,-1.975) 21(-0.25,1.975) 22(-0.25,-1.975) 23(-0.75,1.975) 24(-0.75,-1.975) 25(-1.25,1.975) 26(-1.25,-1.975) 27(-1.75,1.975) 28(-1.75,-1.975) 29(-2.25,1.975) 30(-2.25,-1.975) 31(-2.75,1.975) 32(-2.75,-1.975) 33(-3.25,1.975) 34(-3.25,-1.975) 35(-3.75,1.975) 36(-3.75,-1.975) 37(-4.25,1.975) 38(-4.25,-1.975) 39(-4.75,1.975) 40(-4.75,-1.975)
  round 2 hole 2: ""(-6.909,1.27) ""(6.909,1.397)
  silkscreen extent -8.4,-2.47 8.4,3.52, body extent -8.4,-3.03 8.4,2.97, height 4.85
FP-LQFP100-1L-MFG [mm]
  rect 1.2x0.3 smd paste+0 mask+0: 1(-7.75,6) 2(-7.75,5.5) 3(-7.75,5) 4(-7.75,4.5) 5(-7.75,4) 6(-7.75,3.5) 7(-7.75,3) 8(-7.75,2.5) 9(-7.75,2) 10(-7.75,1.5) 11(-7.75,1) 12(-7.75,0.5) 13(-7.75,0) 14(-7.75,-0.5) 15(-7.75,-1) 16(-7.75,-1.5) 17(-7.75,-2) 18(-7.75,-2.5) 19(-7.75,-3) 20(-7.75,-3.5) 21(-7.75,-4) 22(-7.75,-4.5) 23(-7.75,-5) 24(-7.75,-5.5) 25(-7.75,-6) 51(7.75,-6) 52(7.75,-5.5) 53(7.75,-5) 54(7.75,-4.5) 55(7.75,-4) 56(7.75,-3.5) 57(7.75,-3) 58(7.75,-2.5) 59(7.75,-2) 60(7.75,-1.5) 61(7.75,-1) 62(7.75,-0.5) 63(7.75,0) 64(7.75,0.5) 65(7.75,1) 66(7.75,1.5) 67(7.75,2) 68(7.75,2.5) 69(7.75,3) 70(7.75,3.5) 71(7.75,4) 72(7.75,4.5) 73(7.75,5) 74(7.75,5.5) 75(7.75,6)
  rect 0.3x1.2 smd paste+0 mask+0: 26(-6,-7.75) 27(-5.5,-7.75) 28(-5,-7.75) 29(-4.5,-7.75) 30(-4,-7.75) 31(-3.5,-7.75) 32(-3,-7.75) 33(-2.5,-7.75) 34(-2,-7.75) 35(-1.5,-7.75) 36(-1,-7.75) 37(-0.5,-7.75) 38(0,-7.75) 39(0.5,-7.75) 40(1,-7.75) 41(1.5,-7.75) 42(2,-7.75) 43(2.5,-7.75) 44(3,-7.75) 45(3.5,-7.75) 46(4,-7.75) 47(4.5,-7.75) 48(5,-7.75) 49(5.5,-7.75) 50(6,-7.75) 76(6,7.75) 77(5.5,7.75) 78(5,7.75) 79(4.5,7.75) 80(4,7.75) 81(3.5,7.75) 82(3,7.75) 83(2.5,7.75) 84(2,7.75) 85(1.5,7.75) 86(1,7.75) 87(0.5,7.75) 88(0,7.75) 89(-0.5,7.75) 90(-1,7.75) 91(-1.5,7.75) 92(-2,7.75) 93(-2.5,7.75) 94(-3,7.75) 95(-3.5,7.75) 96(-4,7.75) 97(-4.5,7.75) 98(-5,7.75) 99(-5.5,7.75) 100(-6,7.75)
  silkscreen extent -9.02,-7.1 7.1,7.1, body extent -8.45,-8.45 8.45,8.45, height 0.25
FP-LS_L29K-MFG [mm]
  rect 0.8x0.8 smd paste-1000 mask+0: 1(-0.75,0) 2(0.75,0)
  silkscreen extent -1.85,-0.81 0.7,0.8, body extent -1.25,-0.55 1.25,0.55, height 0.25
FTSH-107-XX-YYY-DV [mm]
  rect 0.74x2.79 smd: 1(-3.81,-2.035) 2(-3.81,2.035) 3(-2.54,-2.035) 4(-2.54,2.035) 5(-1.27,-2.035) 6(-1.27,2.035) 7(0,-2.035) 8(0,2.035) 9(1.27,-2.035) 10(1.27,2.035) 11(2.54,-2.035) 12(2.54,2.035) 13(3.81,-2.035) 14(3.81,2.035)
  silkscreen extent -4.44,-3.83 4.44,1.72, body extent -4.42,-3 4.47,2.84, height 5.96
FUSC6127X294N [mm]
  rect 2.02x2.95 smd: 1(-2.5,0) 2(2.5,0)
  silkscreen extent 0,-1.24 0,1.24, body extent -3.05,-1.35 3.05,1.35, height 2.94
ICM42670P [mm]
  rect 0.6x0.3 smd: 1(-1.15,0.75) 2(-1.15,0.25) 3(-1.15,-0.25) 4(-1.15,-0.75) 8(1.15,-0.75) 9(1.15,-0.25) 10(1.15,0.25) 11(1.15,0.75)
  rect 0.3x0.6 smd: 5(-0.5,-0.9) 6(0,-0.9) 7(0.5,-0.9) 12(0.5,0.9) 13(0,0.9) 14(-0.5,0.9)
  silkscreen extent -1.95,-1.25 1.5,1.25, body extent -1.5,-1.25 1.5,1.25, height 0.65
KRTBDWLM3232T4U6JWAAABJ3R4S65V [mm]
  rect 0.6x0.8 smd: 1(-0.95,-1.162) 3(0.95,-1.162)
  rect 0.5x0.8 smd: 2(0,-1.162)
  rect 0.9x1.35 smd: 4(0.95,1.012) 6(-0.95,1.012)
  rect 0.5x1.05 smd: 5(0,1.162)
  rect 0.6x0.25 smd: 7(0,0.013)
  rect 2.5x0.65 smd: 8(0,-0.437)
  silkscreen extent -1.65,-1.16 1.65,1.16, body extent -1.65,-1.11 1.65,1.14, height 0.7
LL3301FF065QJ [mm]
  rect 2.1x1.4 smd: 1(-3,2.25) 2(3,2.25) 3(-3,-2.25) 4(3,-2.25)
  silkscreen extent -3.9,-3 3,3, body extent -5,-3 5,3, height 3.8
NX2520SA192MHzEXS00ACS05400 [mm]
  rect 1.2x1 smd: 1(-0.85,-0.65) 2(0.85,-0.65) 3(0.85,0.65) 4(-0.85,0.65)
  silkscreen extent -0.85,-1.5 -0.75,-1.4, body extent -1.35,-1.05 1.35,1.05, height 0.65
PJ082BH [mm]
  round 2.55 hole 1.7: 1(0,0)
  round 3.42 hole 2.193: 2(-6,0)
  round 3.36 hole 2.24: MH1(-1.8,4.75) MH2(-6.5,4.75) MH3(-1.8,-4.75) MH4(-6.5,-4.75)
  round 0.8 hole 1.6 unplated: MH5(-9.25,0)
  silkscreen extent -12,-5 1.85,5, body extent -12.11,-5.1 1.02,5.1, height 9.55
RESC1608X50N [mm]
  rect 0.85x1 smd: 1(-0.75,0) 2(0.75,0)
  body extent -0.79,-0.43 0.79,0.43, height 0.5
RESC1608X55N [mm]
  rect 0.95x1 smd: 1(-0.8,0) 2(0.8,0)
  body extent -0.8,-0.4 0.8,0.4, height 0.55
RESC6430X90N [mm]
  rect 2.9x3.3 smd: 1(-2.2,0) 2(2.2,0)
  silkscreen extent 0,-1.43 0,1.43, body extent -3.17,-1.53 3.17,1.53, height 0.9
RPMB5020 [mm]
  rect 1.06x1.06 smd: A1(-4.58,4.58) A2(-2.29,4.58) A3(0,4.58) A4(2.29,4.58) A5(4.58,4.58) B1(-4.58,2.29) B2(-2.29,2.29) B3(0,2.29) B4(2.29,2.29) B5(4.58,2.29) C1(-4.58,0) C2(-2.29,0) C3(0,0) C4(2.29,0) C5(4.58,0) D1(-4.58,-2.29) D2(-2.29,-2.29) D3(0,-2.29) D4(2.29,-2.29) D5(4.58,-2.29) E1(-4.58,-4.58) E2(-2.29,-4.58) E3(0,-4.58) E4(2.29,-4.58) E5(4.58,-4.58)
  silkscreen extent -6.7,-6.09 6.09,6.09, body extent -6.09,-6.09 6.09,6.09, height 4.1
RPMB5030 [mm]
  rect 1.06x1.06 smd: A1(-4.58,4.58) A2(-2.29,4.58) A3(0,4.58) A4(2.29,4.58) A5(4.58,4.58) B1(-4.58,2.29) B2(-2.29,2.29) B3(0,2.29) B4(2.29,2.29) B5(4.58,2.29) C1(-4.58,0) C2(-2.29,0) C3(0,0) C4(2.29,0) C5(4.58,0) D1(-4.58,-2.29) D2(-2.29,-2.29) D3(0,-2.29) D4(2.29,-2.29) D5(4.58,-2.29) E1(-4.58,-4.58) E2(-2.29,-4.58) E3(0,-4.58) E4(2.29,-4.58) E5(4.58,-4.58)
  silkscreen extent -6.91,-6.09 6.09,6.1, body extent -6.34,-6.19 6.35,6.2, height 3.95
SHDRRA4W35P0X125_1X4_675X550X350P [mm]
  rect 1.1x1.1 hole 0.7: 1(0,0)
  round 1.1 hole 0.7: 2(-1.25,0) 3(-2.5,0) 4(-3.75,0)
  silkscreen extent -5.25,-1.05 1.5,4.45, body extent -5.24,-1.05 1.51,4.44, height 3.38
SOIC127P600X175-8N [mm]
  rect 1.525x0.65 smd: 1(-2.712,1.905) 2(-2.712,0.635) 3(-2.712,-0.635) 4(-2.712,-1.905) 5(2.712,-1.905) 6(2.712,-0.635) 7(2.712,0.635) 8(2.712,1.905)
  silkscreen extent -3.47,-2.45 1.6,2.58, body extent -3,-2.45 3,2.45, height 1.75
SOIC127P1032X265-16N [mm]
  rect 1.925x0.7 smd: 1(-4.712,4.445) 2(-4.712,3.175) 3(-4.712,1.905) 4(-4.712,0.635) 5(-4.712,-0.635) 6(-4.712,-1.905) 7(-4.712,-3.175) 8(-4.712,-4.445) 9(4.712,-4.445) 10(4.712,-3.175) 11(4.712,-1.905) 12(4.712,-0.635) 13(4.712,0.635) 14(4.712,1.905) 15(4.712,3.175) 16(4.712,4.445)
  silkscreen extent -5.68,-5.15 3.4,5.15, body extent -5.16,-5.15 5.16,5.15, height 2.65
SOP50P490X110-10N [mm]
  rect 1.4x0.3 smd: 1(-2.2,1) 2(-2.2,0.5) 3(-2.2,0) 4(-2.2,-0.5) 5(-2.2,-1) 6(2.2,-1) 7(2.2,-0.5) 8(2.2,0) 9(2.2,0.5) 10(2.2,1)
  silkscreen extent -2.9,-1.5 1.15,1.5, body extent -2.45,-1.5 2.45,1.5, height 1.1
SOP65P640X120-16N [mm]
  rect 1.475x0.45 smd: 1(-2.938,2.275) 2(-2.938,1.625) 3(-2.938,0.975) 4(-2.938,0.325) 5(-2.938,-0.325) 6(-2.938,-0.975) 7(-2.938,-1.625) 8(-2.938,-2.275) 9(2.938,-2.275) 10(2.938,-1.625) 11(2.938,-0.975) 12(2.938,-0.325) 13(2.938,0.325) 14(2.938,0.975) 15(2.938,1.625) 16(2.938,2.275)
  silkscreen extent -3.67,-2.5 1.85,2.85, body extent -3.2,-2.5 3.2,2.5, height 1.13
SOT65P210X110-3N [mm]
  rect 1x0.5 smd: 1(-1,0.65) 2(-1,-0.65) 3(1,0)
  silkscreen extent -1.5,-1 0.15,1.15, body extent -1.05,-1 1.05,1, height 1.1
XT60PWM [mm]
  round 4.05 hole 2.7: 1(-3.6,0) 2(3.6,0)
  round 2.7 hole 1.8: 3(6.75,6) 4(-6.75,6)
  silkscreen extent -7.75,-1.85 7.75,16.35, body extent -7.95,-1.9 7.95,15.4, height 8.53

## Part data
C1 C2 C3 C4 C5 C13 C14 C16 C18 C19 C20 C21 C22 C25 C26_AFE1 C26_AFE2 C26_AFE3 C26_AFE4 C26_AFE5 C26_AFE6 C36: "Capacitor", Manufacturer_Name=Kemet, Mouser Part Number=80-C0603C104K5R, Arrow Part Number=C0603C104K5RACTU, Arrow Price/Stock=https://www.arrow.com/en/products/c0603c104k5ractu/kemet-corporation, Datasheet Link=http://www.farnell.com/datasheets/2205446.pdf, Height=0.95mm, Manufacturer_Part_Number=C0603C104K5RACTU, Mouser Price/Stock=https://www.mouser.co.uk/ProductDetail/KEMET/C0603C104K5RACTU?qs=l5k%252BbMnNDkkVcnZPSAaaiQ%3D%3D, Supplier 1=Mouser, Supplier Part Number 1=80-C0603C104K5R
C6 C8 C10: "Capacitor", Manufacturer_Name=Kemet, Mouser Part Number=80-C1206C105M5RECTU, Arrow Part Number=C1206C105M5RECTU, Arrow Price/Stock=https://www.arrow.com/en/products/c1206c105m5rectu/kemet-corporation, Datasheet Link=https://content.kemet.com/datasheets/KEM_C1090_X7R_ESD.pdf, Height=1.3mm, Manufacturer_Part_Number=C1206C105M5RECTU, Mouser Price/Stock=https://www.mouser.co.uk/ProductDetail/KEMET/C1206C105M5RECTU?qs=55YtniHzbhBh39CxZCw85g%3D%3D, Supplier 1=Mouser, Supplier Part Number 1=80-C1206C105M5RECTU
C7 C11: "Capacitor", Manufacturer_Name=Kemet, Mouser Part Number=80-CBR06C569B5GAC, Arrow Part Number=CBR06C569B5GAC, Arrow Price/Stock=https://www.arrow.com/en/products/cbr06c569b5gac/kemet-corporation, Datasheet Link=http://www.kemet.com/Lists/ProductCatalog/Attachments/490/KEM_C1030_CBR_SMD.pdf, Height=0.87mm, Manufacturer_Part_Number=CBR06C569B5GAC, Mouser Price/Stock=https://www.mouser.co.uk/ProductDetail/KEMET/CBR06C569B5GAC/?qs=8sjaHP9aayqGSwkvsyWeEw%3D%3D, Supplier 1=Mouser, Supplier Part Number 1=80-CBR06C569B5GAC
C9: "Capacitor", Manufacturer_Name=Kemet, Mouser Part Number=80-C0805C225K4RECLR, Datasheet Link=https://content.kemet.com/datasheets/KEM_C1090_X7R_ESD.pdf, Height=1.4mm, Manufacturer_Part_Number=C0805C225K4REC7210, Mouser Price/Stock=https://www.mouser.co.uk/ProductDetail/KEMET/C0805C225K4REC7210?qs=55YtniHzbhCWJdUu8xFadQ%3D%3D, Supplier 1=Mouser, Supplier Part Number 1=80-C0805C225K4RECLR
C12: library part C0805C475J4RACAUTO, "Capacitor", Manufacturer_Name=Kemet, Mouser Part Number=80-C0805C475J4RAUTO, Arrow Part Number=C0805C475J4RACAUTO, Arrow Price/Stock=https://www.arrow.com/en/products/c0805c475j4racauto/kemet-corporation, Datasheet Link=https://componentsearchengine.com/Datasheets/1/C0805C475J4RACAUTO.pdf, Height=1.4mm, Manufacturer_Part_Number=C0805C475J4RACAUTO, Mouser Price/Stock=https://www.mouser.co.uk/ProductDetail/KEMET/C0805C475J4RACAUTO?qs=HXFqYaX1Q2zgZ196jUXcdQ%3D%3D, Supplier 1=Mouser, Supplier Part Number 1=80-C0805C475J4RAUTO
C15 C31: library part C5750X7R2A475K230KA, "Capacitor", Manufacturer_Name=TDK, Mouser Part Number=810-C5750X7R2A475K, Supplier Part Number 1=810-C5750JB2A475M23A, Arrow Part Number=C5750X7R2A475K230KA, Arrow Price/Stock=https://www.arrow.com/en/products/c5750x7r2a475k230ka/tdk, Datasheet Link=https://product.tdk.com/de/search/capacitor/ceramic/mlcc/info?part_no=C5750X7R2A475K230KA, Height=3.1mm, Manufacturer_Part_Number=C5750X7R2A475K230KA, Mouser Price/Stock=https://www.mouser.co.uk/ProductDetail/TDK/C5750X7R2A475K230KA?qs=NRhsANhppD88FUXESCqIJQ%3D%3D, Supplier 1=Mouser
C17 C32: "Capacitor", Manufacturer_Name=Kemet, Mouser Part Number=80-C1206C106K4R, Arrow Part Number=C1206C106K4RACTU, Arrow Price/Stock=https://www.arrow.com/en/products/c1206c106k4ractu/kemet-corporation, Datasheet Link=https://content.kemet.com/datasheets/KEM_C1002_X7R_SMD.pdf, Manufacturer_Part_Number=C1206C106K4RACTU, Mouser Price/Stock=https://www.mouser.co.uk/ProductDetail/KEMET/C1206C106K4RACTU?qs=guDyKOyRtV0mxqxQedB7kA%3D%3D
C23 C24 C27 C28 C29 C30 C33 C35: library part C0603C104K5RACTU, "Capacitor", Manufacturer_Name=Kemet, Mouser Part Number=80-C0603C104K5R, Arrow Part Number=C0603C104K5RACTU, Arrow Price/Stock=https://www.arrow.com/en/products/c0603c104k5ractu/kemet-corporation, Datasheet Link=http://www.farnell.com/datasheets/2205446.pdf, Height=0.95mm, Manufacturer_Part_Number=C0603C104K5RACTU, Mouser Price/Stock=https://www.mouser.co.uk/ProductDetail/KEMET/C0603C104K5RACTU?qs=l5k%252BbMnNDkkVcnZPSAaaiQ%3D%3D, Supplier 1=Mouser, Supplier Part Number 1=80-C0603C104K5R
C34: library part C1206C106K4RACTU, "Capacitor", Manufacturer_Name=Kemet, Mouser Part Number=80-C1206C106K4R, Arrow Part Number=C1206C106K4RACTU, Arrow Price/Stock=https://www.arrow.com/en/products/c1206c106k4ractu/kemet-corporation, Datasheet Link=https://content.kemet.com/datasheets/KEM_C1002_X7R_SMD.pdf, Manufacturer_Part_Number=C1206C106K4RACTU, Mouser Price/Stock=https://www.mouser.co.uk/ProductDetail/KEMET/C1206C106K4RACTU?qs=guDyKOyRtV0mxqxQedB7kA%3D%3D
D1: "Diode", Manufacturer_Name=Vishay, Mouser Part Number=78-BZG03C33-HM3-08, Arrow Part Number=BZG03C33-HM3-08, Arrow Price/Stock=https://www.arrow.com/en/products/bzg03c33-hm3-08/vishay, Datasheet Link=https://www.arrow.com/en/products/bzg03c33-hm3-08/vishay, Height=2.29mm, Manufacturer_Part_Number=BZG03C33-HM3-08, Mouser Price/Stock=https://www.mouser.co.uk/ProductDetail/Vishay-Semiconductors/BZG03C33-HM3-08?qs=j%252B1pi9TdxUbhV%2FXINkfeTw%3D%3D
D2 D3: library part CMP-62016-000014-1, "LED RED DIFFUSED 0603 SMD", Colour=Red, Forward Current=2mA, Forward Voltage=1.8V, Manufacturer="Osram Opto", Max Junction Temp=+110°C, Package=LS_L29K, Reverse Voltage=12V, Temperature="-40°C to +100°C", Temperature Range High=+100°C, Temperature Range Low=-40°C, Automotive=No, Category=Diode, ComponentLink2Description=Datasheet, ComponentLink2URL=https://dammedia.osram.info/media/resource/hires/osram-dam-5662679/LS%20L29K_EN.pdf, Device Class L1=Optoelectronics, Device Class L2=LEDs, Device Class L3=unset, Digikey Description="LED RED DIFFUSED 0603 SMD", Height=0.67mm, Lead Free=Yes, Led Orientation="Top View", Luminous Flux=0.0081/0.0254lm, Luminous Intensity=1.8-2.24/5.6-7.1mcd, Manufacturer Part Number="LS L29K-G1J2-1-Z", Mouser Description="LED Uni-Color Red 643nm Automotive 2-Pin SMD T/R", Octopart=https://octopart.com/ls+l29k-g1j2-1-z-osram+opto-31093939, Peak Emmision Wavelength=643nm, RoHS=TRUE, Viewing Angle=160°, Wavelength=630nm
F1_HV F1_LV: "Fuse", Manufacturer_Name=LITTELFUSE, Mouser Part Number=576-0451020.MRL, Arrow Part Number=0451020.MRL, Arrow Price/Stock=https://www.arrow.com/en/products/0451020.mrl/littelfuse, Datasheet Link=https://m.littelfuse.com/~/media/electronics/datasheets/fuses/littelfuse_fuse_451_453_datasheet.pdf.pdf, Height=2.94mm, Manufacturer_Part_Number=0451020.MRL, Mouser Price/Stock=https://www.mouser.co.uk/ProductDetail/Littelfuse/0451020MRL?qs=ZaMXuU%252B6JZZbQqgd%2F3uvYw%3D%3D
IC1: "Integrated Circuit", Manufacturer_Name=TDK, Mouser Part Number=410-ICM-42670-P, Arrow Part Number=ICM-42670-P, Arrow Price/Stock=https://www.arrow.com/en/products/icm-42670-p/invensense?region=nac, Datasheet Link=https://3cfeqx1hf82y3xcoull08ihx-wpengine.netdna-ssl.com/wp-content/uploads/2021/07/DS-000451-ICM-42670-P-v1.0.pdf, Manufacturer_Part_Number=ICM-42670-P, Mouser Price/Stock=https://www.mouser.co.uk/ProductDetail/TDK-InvenSense/ICM-42670-P?qs=iLbezkQI%252BsgK8sMF5V7fQQ%3D%3D
IC2: "Integrated Circuit", Manufacturer_Name=Micron, Mouser Part Number=340-285789-TRAY, Arrow Part Number=MT25QL512ABB8ESF-0AAT, Arrow Price/Stock=https://www.arrow.com/en/products/mt25ql512abb8esf-0aat/micron-technology, Datasheet Link=https://media-www.micron.com/-/media/client/global/documents/products/data-sheet/nor-flash/serial-nor/mt25q/die-rev-b/mt25q_qlkt_l_512_abb_0.pdf?rev=0ef0faa5f7b645d7bc11c30bfd27505b, Height=2.65mm, Manufacturer_Part_Number=MT25QL512ABB8ESF-0AAT, Mouser Price/Stock=https://www.mouser.co.uk/ProductDetail/Micron/MT25QL512ABB8ESF-0AAT?qs=rrS6PyfT74da2PZ8DoLIJg%3D%3D, Supplier 1=Mouser, Supplier Part Number 1=340-285789-TRAY
IC3: "Integrated Circuit", Manufacturer_Name="Texas Instruments", Mouser Part Number=595-CD74HC137PWR, Arrow Part Number=CD74HC137PWR, Arrow Price/Stock=https://www.arrow.com/en/products/cd74hc137pwr/texas-instruments, Datasheet Link=http://www.ti.com/lit/gpn/cd74hc137, Height=1.2mm, Manufacturer_Part_Number=CD74HC137PWR, Mouser Price/Stock=https://www.mouser.co.uk/ProductDetail/Texas-Instruments/CD74HC137PWR/?qs=YxwvVplHM%2Fm8ZkoHTCdntQ%3D%3D, Supplier 1=Mouser, Supplier Part Number 1=595-CD74HC137PWR
IC4_AFE1 IC4_AFE2 IC4_AFE3 IC4_AFE4 IC4_AFE5 IC4_AFE6: library part INA229AQDGSRQ1, "Integrated Circuit", Manufacturer_Name="Texas Instruments", Mouser Part Number=595-INA229AQDGSRQ1, Supplier Part Number 1=595-INA239AQDGSRQ1, Arrow Part Number=INA229AQDGSRQ1, Arrow Price/Stock=https://www.arrow.com/en/products/ina229aqdgsrq1/texas-instruments?region=nac, Datasheet Link=https://www.ti.com/lit/ds/symlink/ina229-q1.pdf?ts=1625593362739, Height=1.1mm, Manufacturer_Part_Number=INA229AQDGSRQ1, Mouser Price/Stock=https://www.mouser.co.uk/ProductDetail/Texas-Instruments/INA229AQDGSRQ1?qs=QNEnbhJQKvYTGkxSAfXBrQ%3D%3D, Supplier 1=Mouser
IC5: "Integrated Circuit", Manufacturer_Name="Texas Instruments", Mouser Part Number=595-SN65HVD232QDR, Arrow Part Number=SN65HVD232QDR, Arrow Price/Stock=https://www.arrow.com/en/products/sn65hvd232qdr/texas-instruments?region=nac, Datasheet Link=http://www.ti.com/lit/gpn/SN65HVD232Q, Height=1.75mm, Manufacturer_Part_Number=SN65HVD232QDR, Mouser Price/Stock=https://www.mouser.co.uk/ProductDetail/Texas-Instruments/SN65HVD232QDR?qs=QViXGNcIEAuDpfsGPShang%3D%3D
J1 J3: "Connector", Manufacturer_Name="Changzou Amass Elec", Datasheet Link=https://www.tme.eu/Document/9b8d0c5eb7094295f3d3112c214d3ade/XT60PW%20SPEC.pdf, Height=8.4mm, Manufacturer_Part_Number=XT60PW-M
J2 J5 J6 J7: "Connector", Manufacturer_Name=Molex, Mouser Part Number=538-53048-0450, Datasheet Link=https://www.molex.com/pdm_docs/sd/530480450_sd.pdf, Height=3.5mm, Manufacturer_Part_Number=53048-0450, Mouser Price/Stock=https://www.mouser.co.uk/ProductDetail/Molex/53048-0450?qs=0lSvoLzn4L%252Bhzo05ywM78Q%3D%3D
J4: "Connector", Manufacturer_Name=SAMTEC, Mouser Part Number=200-FTSH10701FDV, Arrow Part Number=FTSH-107-01-F-DV, Arrow Price/Stock=https://www.arrow.com/en/products/ftsh-107-01-f-dv/samtec, Datasheet Link=http://suddendocs.samtec.com/prints/ftsh-1xx-xx-xxx-dv-xxx-xxx-mkt.pdf, Manufacturer_Part_Number=FTSH-107-01-F-DV, Mouser Price/Stock=https://www.mouser.co.uk/ProductDetail/Samtec/FTSH-107-01-F-DV?qs=0lQeLiL1qyalhkvT7SJ4Kw%3D%3D, Supplier 1=Mouser, Supplier Part Number 1=200-FTSH10701FDV
J10: "Connector", Manufacturer_Name=SAMTEC, Mouser Part Number=200-ERF5020070LDVKTR, Arrow Part Number=ERF5-020-07.0-L-DV-K-TR, Arrow Price/Stock=https://www.arrow.com/en/products/erf5-020-07.0-l-dv-k-tr/samtec, Datasheet Link=http://suddendocs.samtec.com/prints/erf5-xxx-xx.x-x-dv-xx-tr-mkt.pdf, Manufacturer_Part_Number=ERF5-020-07.0-L-DV-K-TR, Mouser Price/Stock=https://www.mouser.co.uk/ProductDetail/Samtec/ERF5-020-070-L-DV-K-TR?qs=PB6%2FjmICvI2cw95I39aPSA%3D%3D, System=Connector
J12_PWR1A1 J12_PWR1A2 J12_PWR1B1 J12_PWR1B2 J12_PWR2A1 J12_PWR2A2 J12_PWR2B1 J12_PWR2B2: "Connector", Manufacturer_Name="CUI Inc.", Mouser Part Number=490-PJ-082BH, Arrow Part Number=PJ-082BH, Arrow Price/Stock=https://www.arrow.com/en/products/pj-082bh/cui-devices?region=nac, Datasheet Link=https://www.mouser.co.uk/datasheet/2/670/pj_082bh-1779031.pdf, Height=10.2mm, Manufacturer_Part_Number=PJ-082BH, Mouser Price/Stock=https://www.mouser.co.uk/ProductDetail/CUI-Devices/PJ-082BH?qs=WyjlAZoYn52P2Lo8hPB1tg%3D%3D, Supplier 1=Mouser, Supplier Part Number 1=490-PJ-082BH
J13_HV J13_LV: "Connector", System=Connector
J14: "Connector", Manufacturer_Name=Molex, Mouser Part Number=538-505110-3091, Datasheet Link=https://www.molex.com/pdm_docs/sd/5051103091_sd.pdf, Height=2.1mm, Manufacturer_Part_Number=505110-3091, Mouser Price/Stock=https://www.mouser.co.uk/ProductDetail/Molex/505110-3091?qs=fSIr1QPo%2F%2FSZ9fkf9Qvqqg%3D%3D
LED2: library part KRTBDWLM32.32-T4U6-JW+AAAB-J3+R4S6-5V, "LED", Manufacturer_Name=OSRAM, Mouser Part Number=720-KRTBDWLM323A7940, Datasheet Link=https://dammedia.osram.info/media/resource/hires/osram-dam-12226989/KRTBDWLM32.32_EN.pdf, Height=0.7mm, Manufacturer_Part_Number=KRTBDWLM32.32-T4U6-JW+AAAB-J3+R4S6-5V, Mouser Price/Stock=https://www.mouser.co.uk/ProductDetail/OSRAM-Opto-Semiconductors/KRTBDWLM3232-T4U6-JW%2bAAAB-J3%2bR4S6-5V?qs=DPoM0jnrROWJ%2F8aeLsBacQ%3D%3D, Supplier 1=Mouser, Supplier Part Number 1=720-KRTBDWLM323A7940
PS1: library part RPMB5.0-3.0, "Power Supply", Manufacturer_Name="RECOM Power", Mouser Part Number=919-RPMB5.0-3.0, Supplier Part Number 1=919-RPMB3.3-3.0, Datasheet Link=https://componentsearchengine.com/Datasheets/1/RPMB5.0-3.0.pdf, Height=3.75mm, Manufacturer_Part_Number=RPMB5.0-3.0, Mouser Price/Stock=https://www.mouser.co.uk/ProductDetail/RECOM-Power/RPMB50-30?qs=wnTfsH77Xs7FdqATAuFwWQ%3D%3D, Supplier 1=Mouser
PS2: "Power Supply", Manufacturer_Name="RECOM Power", Datasheet Link=https://g.recomcdn.com/media/Datasheet/pdf/.f_GMSoRX/.t173c310db6f6fe5108a0/Datasheet-322/RPMB-2_0.pdf, Height=4mm, Manufacturer_Part_Number=RPMB5.0-2.0
Q5_LED_ST_B Q5_LED_ST_G Q5_LED_ST_R: "MOSFET (N-Channel)", Manufacturer_Name="Diodes Inc.", Mouser Part Number=621-DMN2004WK-7, Arrow Part Number=DMN2004WK-7, Arrow Price/Stock=null?region=asia, Datasheet Link=https://www.arrow.com/en/products/dmn2004wk-7/diodes-incorporated, Height=1.1mm, Manufacturer_Part_Number=DMN2004WK-7, Mouser Price/Stock=https://www.mouser.co.uk/ProductDetail/Diodes-Incorporated/DMN2004WK-7?qs=mQbszxtPdlNeJRFooqJmcQ%3D%3D
R1 R19: "Resistor", Manufacturer_Name=Vishay, Mouser Part Number=71-CRCW06031K00JNEAC, Arrow Part Number=CRCW06031K00JNEAC, Arrow Price/Stock=https://www.arrow.com/en/products/crcw06031k00jneac/vishay?region=nac, Datasheet Link=http://www.vishay.com/docs/28773/crcwce3.pdf, Height=0.55mm, Manufacturer_Part_Number=CRCW06031K00JNEAC, Mouser Price/Stock=https://www.mouser.co.uk/ProductDetail/Vishay-Dale/CRCW06031K00JNEAC?qs=E3Y5ESvWgWPM5t3DlmyFHQ%3D%3D
R2 R3 R4 R5 R6 R7 R8 R12 R13 R14 R15 R21 R22: library part CRCW0603931RFKEA, "Resistor", Manufacturer_Name=Vishay, Manufacturer_Part_Number=CRCW0603787RFKEA, Supplier Part Number 1=71-CRCW06032K00JNEB, Datasheet Link=http://www.vishay.com/docs/20035/dcrcwe3.pdf, Height=0.5mm, Supplier 1=Mouser
R9_DIV1 R9_DIV2: "Resistor", Manufacturer_Name=Vishay, Datasheet Link=https://datasheet.datasheetarchive.com/originals/distributors/DKDS41/DSANUWW0030147.pdf, Height=0.55mm, Manufacturer_Part_Number=TNPW0603100KBEEA
R10_DIV1 R10_DIV2: "Resistor", Manufacturer_Name=Vishay, Mouser Part Number=71-TNPW06033K00BEEA, Datasheet Link=http://www.vishay.com/docs/28758/tnpw_e3.pdf, Height=0.55mm, Manufacturer_Part_Number=TNPW06033K00BEEA, Mouser Price/Stock=https://www.mouser.co.uk/ProductDetail/Vishay-Dale/TNPW06033K00BEEA?qs=kHCK1FE53PnaIDT%252BQ71GHQ%3D%3D
R11_AFE1 R11_AFE2 R11_AFE3 R11_AFE4 R11_AFE5 R11_AFE6: "Resistor", Manufacturer_Name=Ohmite, Mouser Part Number=588-PCS2512FR0010ET, Datasheet Link=https://www.mouser.com/datasheet/2/303/res_pcs-1665423.pdf, Height=0.904mm, Manufacturer_Part_Number=PCS2512FR0010ET, Mouser Price/Stock=https://www.mouser.co.uk/ProductDetail/Ohmite/PCS2512FR0010ET?qs=Zz7%252BYVVL6bExv9xLWZznUg%3D%3D
R16: "Resistor", Manufacturer_Name=Vishay, Mouser Part Number=71-CRCW060320R0FKEAC, Arrow Part Number=CRCW060320R0FKEAC, Arrow Price/Stock=https://www.arrow.com/en/products/crcw060320r0fkeac/vishay, Datasheet Link=http://www.vishay.com/docs/28773/crcwce3.pdf, Height=0.55mm, Manufacturer_Part_Number=CRCW060320R0FKEAC, Mouser Price/Stock=https://www.mouser.com/Search/Refine.aspx?Keyword=71-CRCW060320R0FKEAC, Supplier 1=Mouser, Supplier Part Number 1=71-CRCW060320R0FKEAC
R17 R18: library part CRCW060310R0FKEAC, "Resistor", Manufacturer_Name=Vishay, Mouser Part Number=71-CRCW060310R0FKEAC, Supplier Part Number 1=16059657, Arrow Part Number=CRCW060310R0FKEAC, Arrow Price/Stock=https://www.arrow.com/en/products/crcw060310r0fkeac/vishay, Datasheet Link=https://ms.componentsearchengine.com/Datasheets/1/CRCW060310R0FKEAC.pdf, Height=0.55mm, Manufacturer_Part_Number=CRCW060310R0FKEAC, Mouser Price/Stock=https://www.mouser.co.uk/ProductDetail/Vishay-Dale/CRCW060310R0FKEAC?qs=E3Y5ESvWgWP5XvJ40P8QAg%3D%3D, Supplier 1=Distrelec
R20_LED_ST_B R20_LED_ST_G R20_LED_ST_R: library part CRCW06031K00JNEAC, "Resistor", Manufacturer_Name=Vishay, Mouser Part Number=71-CRCW06031K00JNEAC, Arrow Part Number=CRCW06031K00JNEAC, Arrow Price/Stock=https://www.arrow.com/en/products/crcw06031k00jneac/vishay?region=nac, Datasheet Link=http://www.vishay.com/docs/28773/crcwce3.pdf, Height=0.55mm, Manufacturer_Part_Number=CRCW06031K00JNEAC, Mouser Price/Stock=https://www.mouser.co.uk/ProductDetail/Vishay-Dale/CRCW06031K00JNEAC?qs=E3Y5ESvWgWPM5t3DlmyFHQ%3D%3D
S1 S2: library part LL3301AF065QJ, "Switch", Manufacturer_Name=E-Switch, Mouser Part Number=612-LL3301AF065QJ, Datasheet Link=https://media.digikey.com/pdf/Data%20Sheets/E-Switch%20PDFs/LL3301AF065QJ.pdf, Height=7.3mm, Manufacturer_Part_Number=LL3301AF065QJ, Mouser Price/Stock=https://www.mouser.co.uk/ProductDetail/E-Switch/LL3301AF065QJ?qs=QtyuwXswaQi68RkbBY57jQ%3D%3D, Supplier 1=Mouser, Supplier Part Number 1=612-LL3301AF065QJ
U1: library part CMP-12105-000017-1, "IC MCU 32BIT 128KB FLASH 100LQFP", Ambient Temperature Range High=+85°C, Ambient Temperature Range Low=-40°C, Frequency=480MHz, Manufacturer=STMicroelectronics, Max Junction Temp=+125°C, Max Supply Voltage=3.6V, Min Supply Voltage=1.62V, Package=LQFP100-1L, Temperature="-40°C to +125°C", Automotive=No, Category=IC, ComponentLink2Description=Datasheet, ComponentLink2URL=https://www.st.com/resource/en/datasheet/stm32h750vb.pdf, Core Architecture="ARM Cortex-M7", Data Bus Width=32bits, Device Class L1="Integrated Circuits (ICs)", Device Class L2="Embedded Processors and Controllers", Device Class L3=Microcontrollers, Digikey Description="IC MCU 32BIT 128KB FLASH 100LQFP", Height=1.6mm, Interface=I2C,SPI,UART,USART,CAN,USB,LIN,IrDA,Ethernet,I2S,Other, Lead Free=Yes, Manufacturer Part Number=STM32H750VBT6, Memory Size=128KBytes, Memory Type=FLASH, Mouser Description="MCU 32-Bit STM32H750VB ARM Cortex M7 RISC 128KB Flash 1.8V/2.5V/3.3V 100-Pin LQFP Tray", Number Of A/D Converters=3, Number Of Adc Channels=36, Number Of Cores=1, Number Of Ethernet Channels=1, Number Of I2C Channels=4, Number Of I/Os=82, Number Of Pwm Channels=42, Number Of Spi Channels=6, Number Of Timers/Counters=20, Number Of Uart Channels=9, Number Of Usb Channels=2, Octopart=https://octopart.com/stm32h750vbt6-stmicroelectronics-94048547, Ram Size=1MBytes, RoHS=TRUE, Standoff Height=0.05mm, Temperature Range High=+125°C, Temperature Range Low=-40°C
U2: library part CMP-0859-00019-3, "Single Bus Buffer Gate With 3-State Outputs, DBV0005A, LARGE T&R", F @ Nom Voltage(Max)(Mhz)=150, Generic Part Number=SN74LVC1G125, ICC @ Nom Voltage(Max)(mA)=0.01, Manufacturer="Texas Instruments", Operating Temperature Range(C)="-40 to 125,-40 to 85", Rating=Catalog, tpd @ Nom Voltage(Max)(ns)=9,5.5,4.5,4, Voltage(Nom)(V)=1.8,2.5,3.3,5, 3-State Output=Yes, Bits(#)=1, DatasheetVersion=SCES223T, Input Type=CMOS/TTL, Logic=True, Output Drive (IOL/IOH)(Max)(mA)=32/-32, Output Type=CMOS, PackageReference=DBV0005A, Schmitt Trigger=No, Sub-Family="Non-Inverting Buffer/Driver", Technology Family=LVC, VCC(Max)(V)=5.5, VCC(Min)(V)=1.65